# EAGLE board L6470AutoDriver-Panel_v13 (EAGLE 7.5.0), part 1 of 3
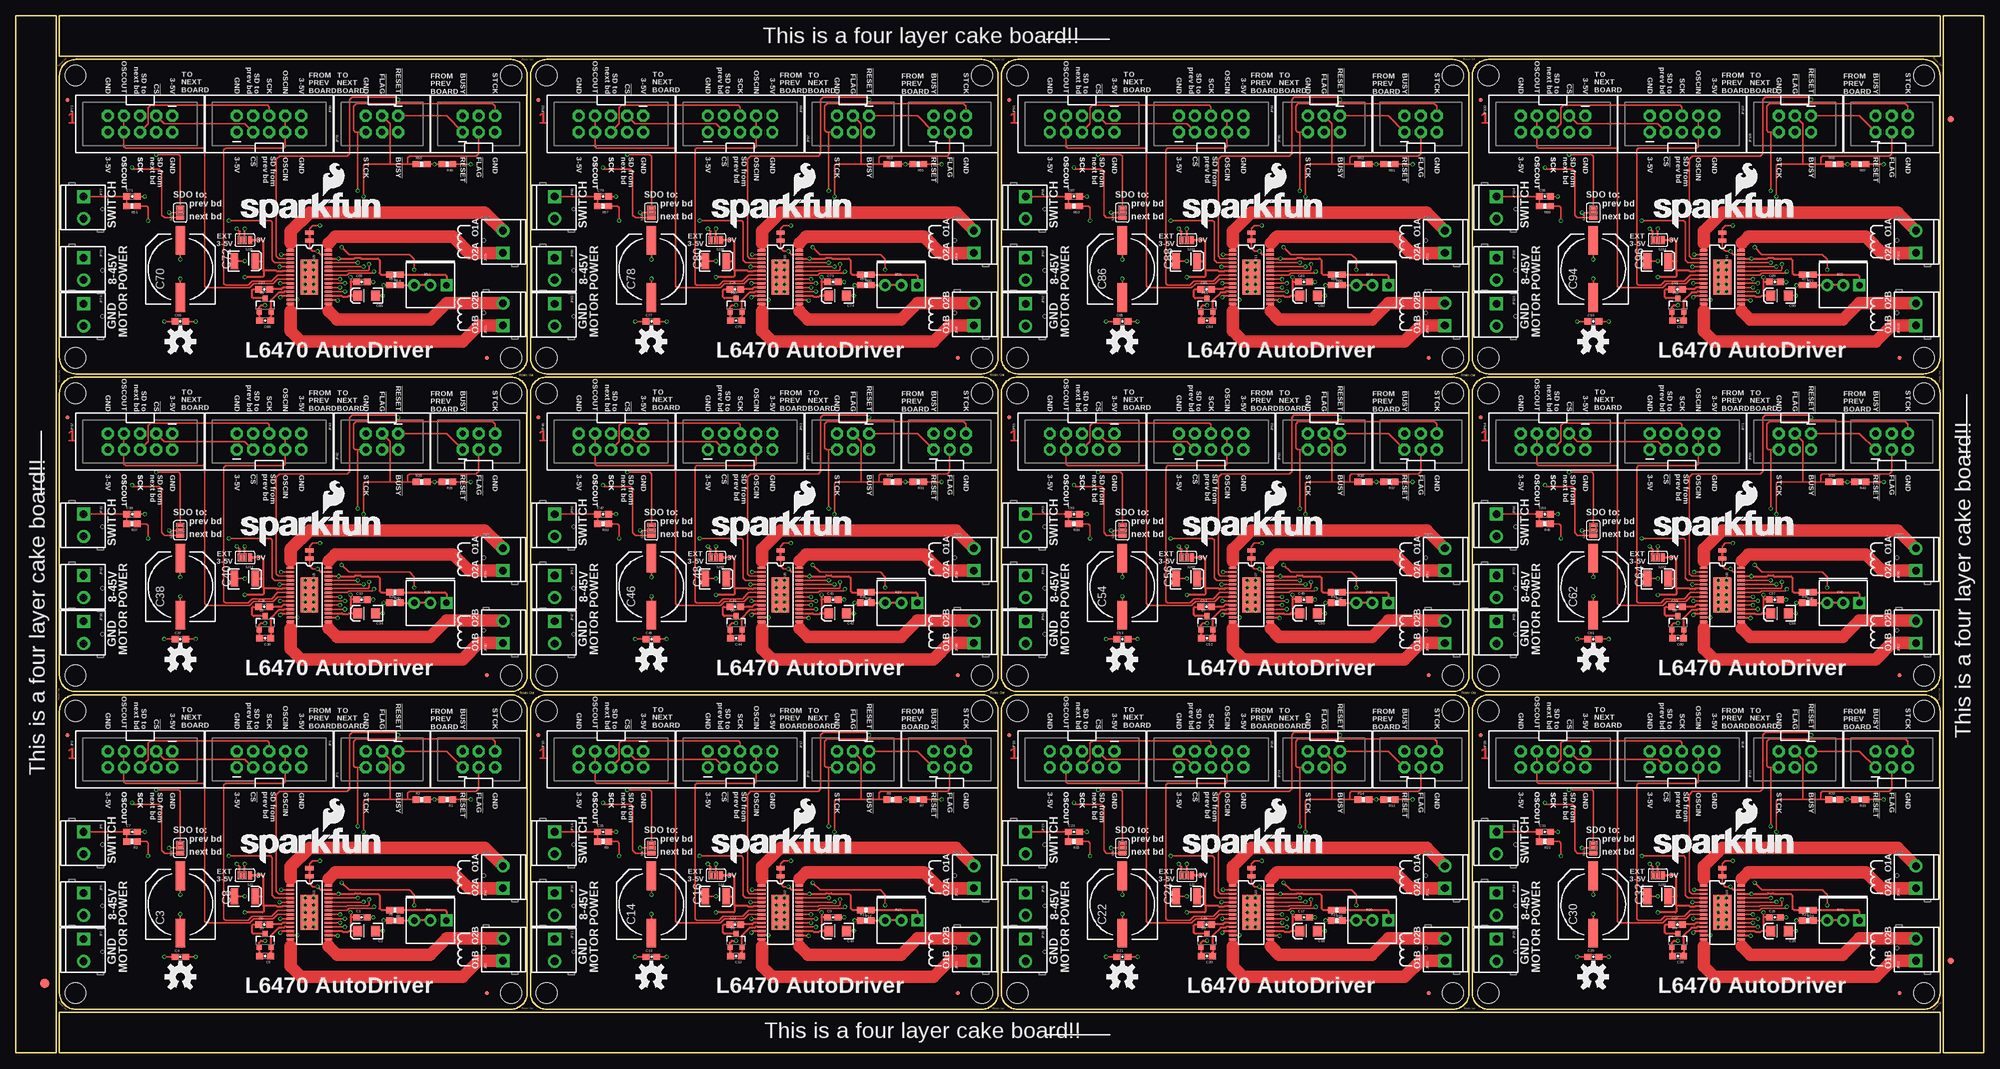
[diagram p0: board, top side]
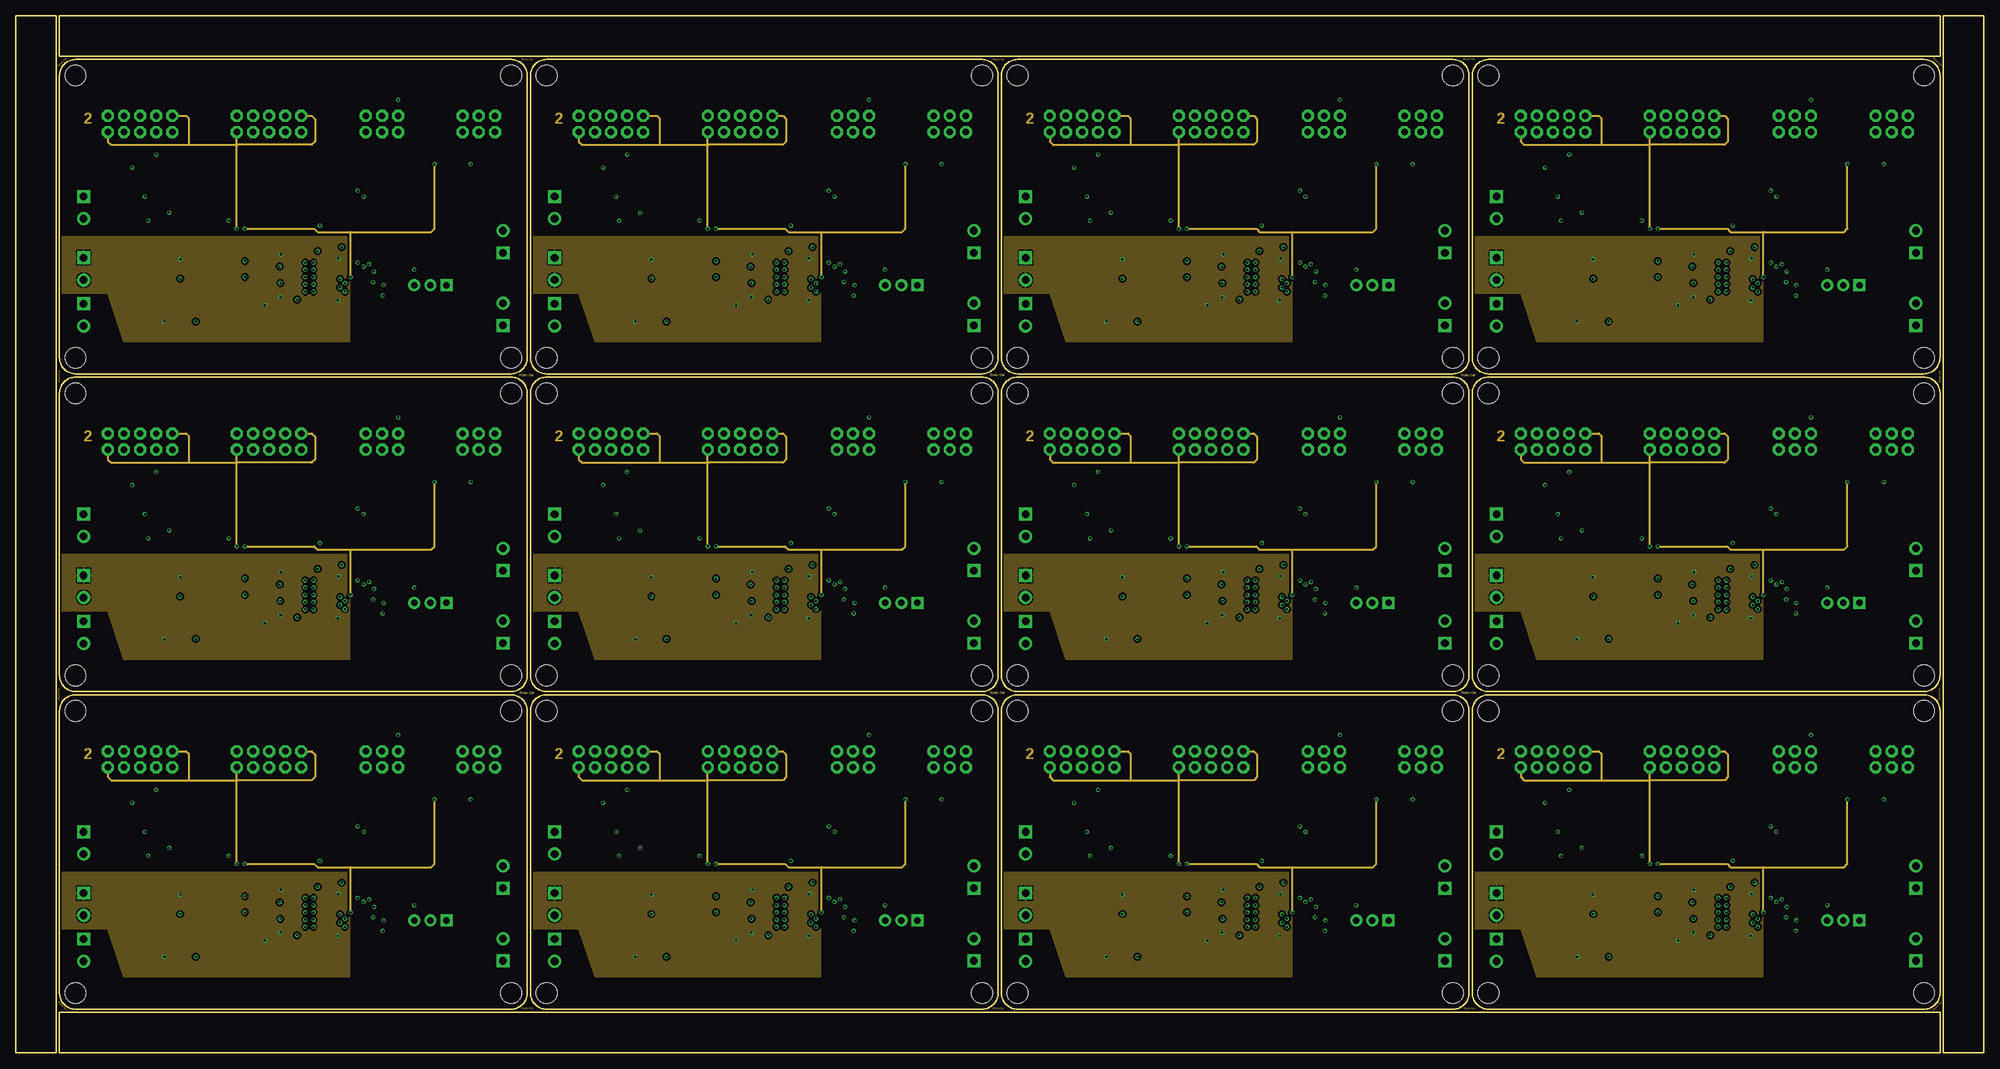
[diagram p1: board, inner layer Route2]
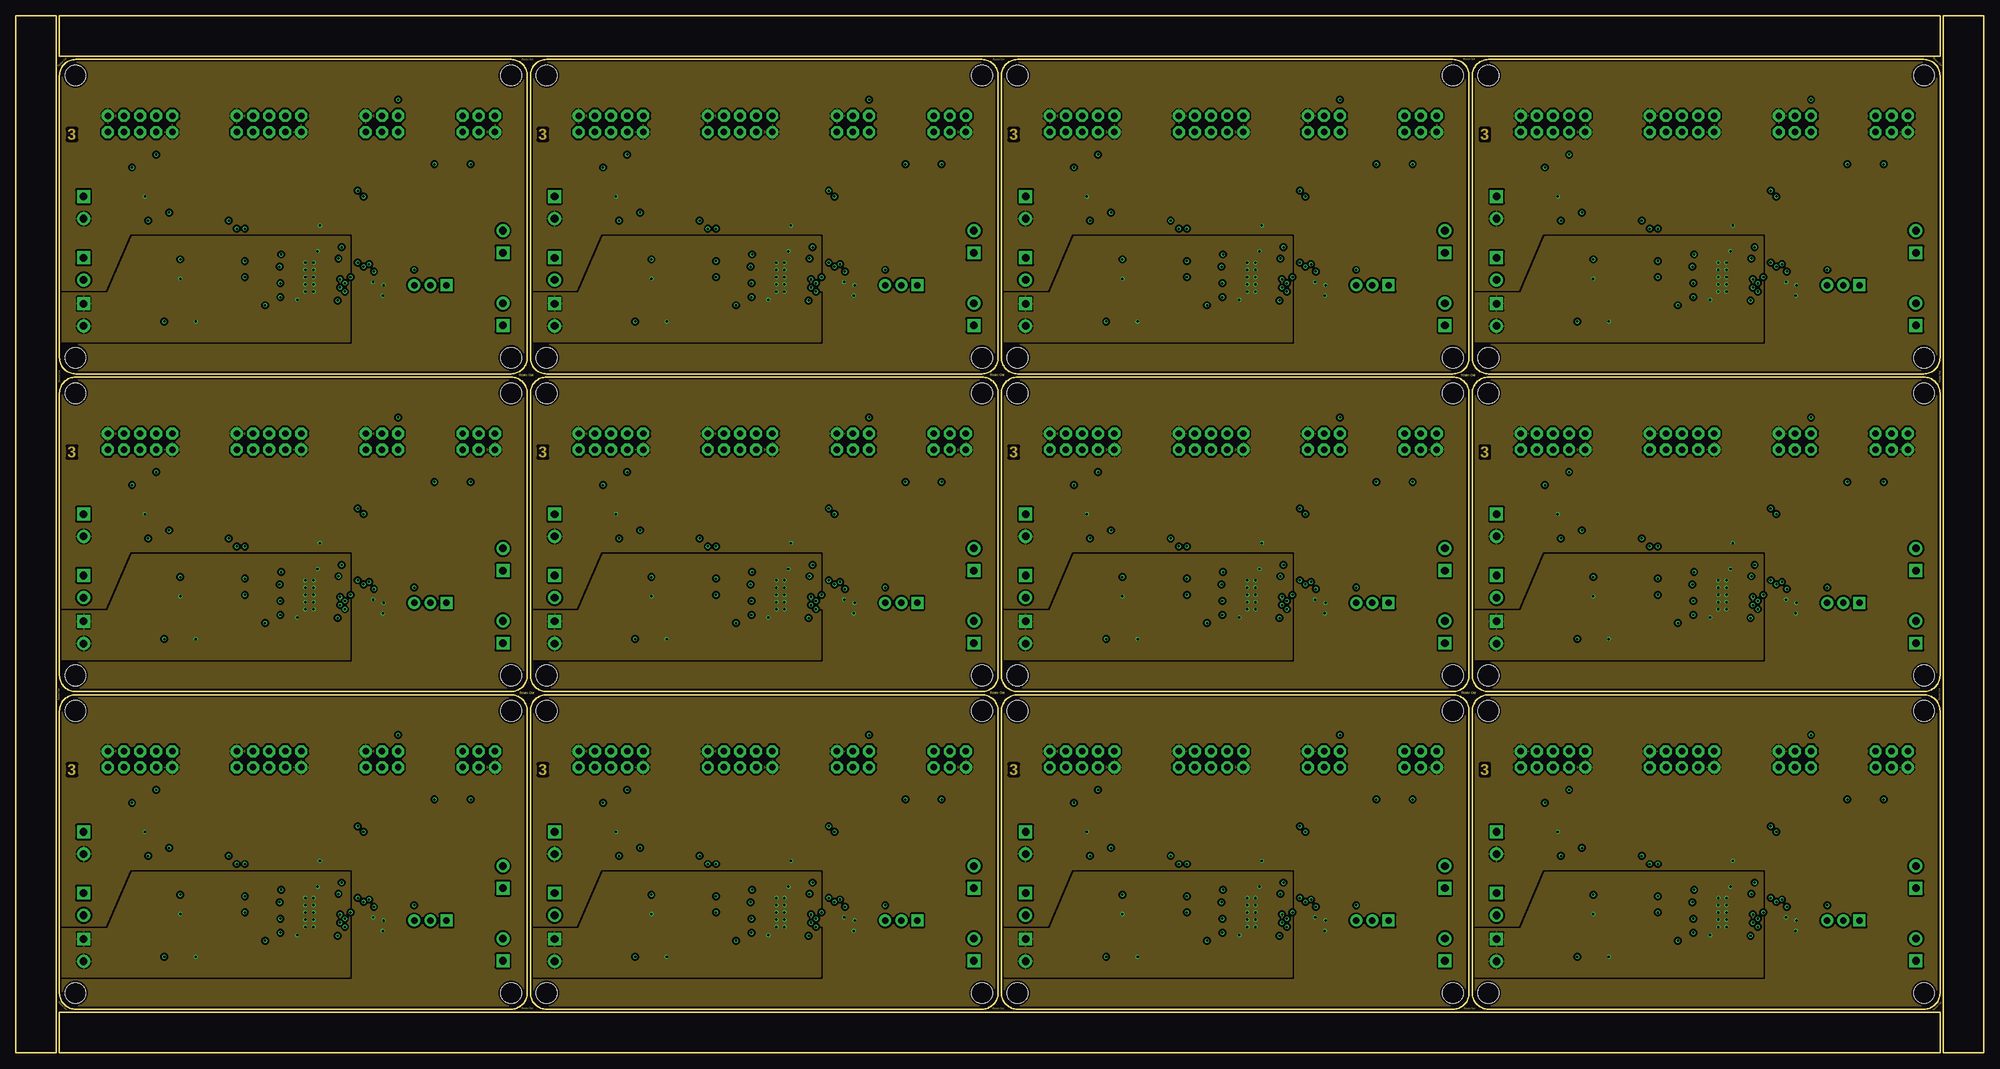
[diagram p2: board, inner layer Route15]
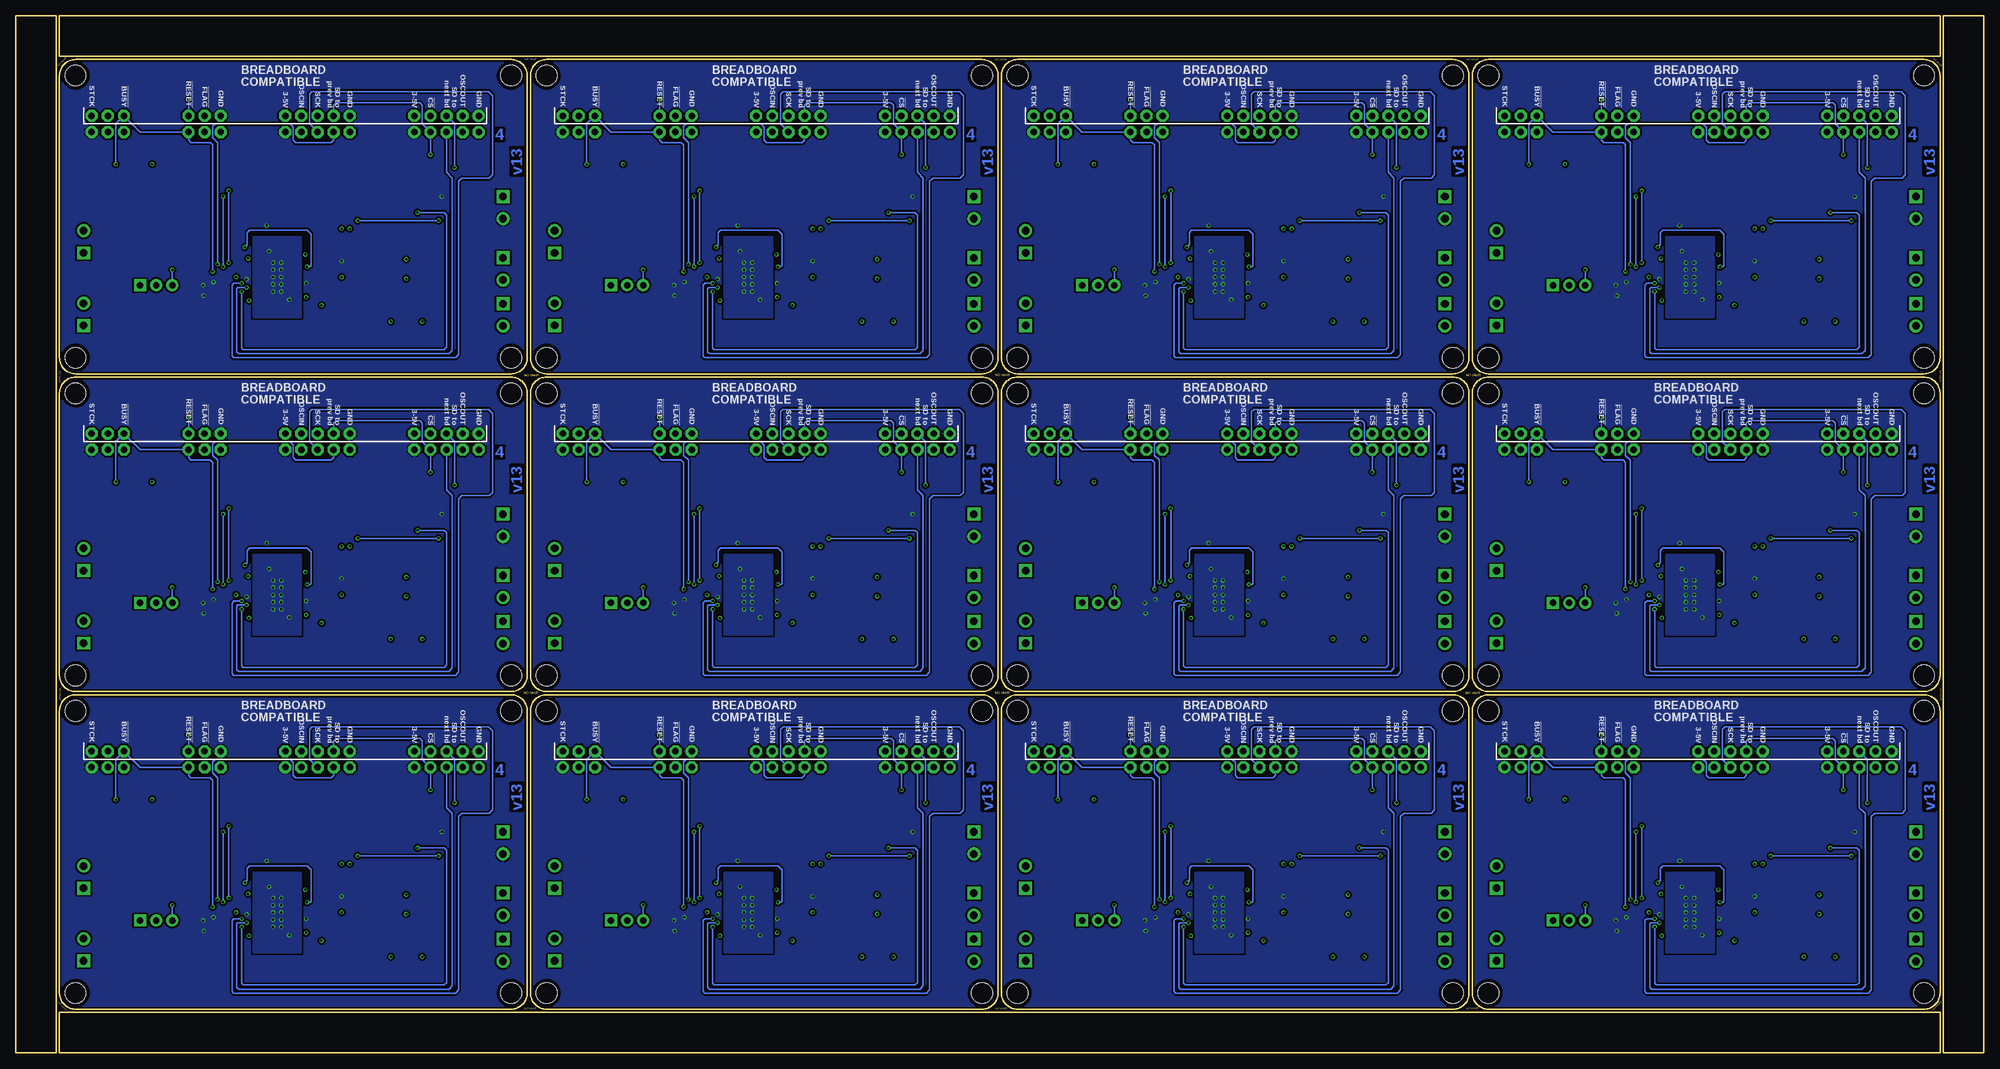
[diagram p3: board, bottom side, seen from below]

Size 309.88 x 163.32 mm. Coordinates in mm from the lower left corner, seen from the top.
Outline: 6.35,79.25 6.35,0 0,0 0,29.72
Outline: 0,27.18 0,163.32 6.35,163.32 6.35,76.71
Outline: 79.25,0 6.86,0 6.86,6.35 29.72,6.35
Outline: 27.18,6.35 303.02,6.35 303.02,0 76.71,0
Outline: 309.88,79.25 309.88,0 303.53,0 303.53,29.72
Outline: 303.53,27.18 303.53,163.32 309.88,163.32 309.88,76.71
Outline: 230.63,163.32 303.02,163.32 303.02,156.97 280.16,156.97
Outline: 282.7,156.97 6.86,156.97 6.86,163.32 233.17,163.32
Outline: 77.98,6.86 9.4,6.86 arc-90 6.86,9.4 6.86,53.85 arc-90 9.4,56.39 77.98,56.39 arc-90 80.52,53.85 80.52,9.4 arc-90 77.98,6.86
Outline: 152.15,6.86 83.57,6.86 arc-90 81.03,9.4 81.03,53.85 arc-90 83.57,56.39 152.15,56.39 arc-90 154.69,53.85 154.69,9.4 arc-90 152.15,6.86
Outline: 226.31,6.86 157.73,6.86 arc-90 155.19,9.4 155.19,53.85 arc-90 157.73,56.39 226.31,56.39 arc-90 228.85,53.85 228.85,9.4 arc-90 226.31,6.86
Outline: 300.48,6.86 231.9,6.86 arc-90 229.36,9.4 229.36,53.85 arc-90 231.9,56.39 300.48,56.39 arc-90 303.02,53.85 303.02,9.4 arc-90 300.48,6.86
Outline: 77.98,56.9 9.4,56.9 arc-90 6.86,59.44 6.86,103.89 arc-90 9.4,106.43 77.98,106.43 arc-90 80.52,103.89 80.52,59.44 arc-90 77.98,56.9
Outline: 152.15,56.9 83.57,56.9 arc-90 81.03,59.44 81.03,103.89 arc-90 83.57,106.43 152.15,106.43 arc-90 154.69,103.89 154.69,59.44 arc-90 152.15,56.9
Outline: 226.31,56.9 157.73,56.9 arc-90 155.19,59.44 155.19,103.89 arc-90 157.73,106.43 226.31,106.43 arc-90 228.85,103.89 228.85,59.44 arc-90 226.31,56.9
Outline: 300.48,56.9 231.9,56.9 arc-90 229.36,59.44 229.36,103.89 arc-90 231.9,106.43 300.48,106.43 arc-90 303.02,103.89 303.02,59.44 arc-90 300.48,56.9
Outline: 77.98,106.93 9.4,106.93 arc-90 6.86,109.47 6.86,153.92 arc-90 9.4,156.46 77.98,156.46 arc-90 80.52,153.92 80.52,109.47 arc-90 77.98,106.93
Outline: 152.15,106.93 83.57,106.93 arc-90 81.03,109.47 81.03,153.92 arc-90 83.57,156.46 152.15,156.46 arc-90 154.69,153.92 154.69,109.47 arc-90 152.15,106.93
Outline: 226.31,106.93 157.73,106.93 arc-90 155.19,109.47 155.19,153.92 arc-90 157.73,156.46 226.31,156.46 arc-90 228.85,153.92 228.85,109.47 arc-90 226.31,106.93
Outline: 300.48,106.93 231.9,106.93 arc-90 229.36,109.47 229.36,153.92 arc-90 231.9,156.46 300.48,156.46 arc-90 303.02,153.92 303.02,109.47 arc-90 300.48,106.93
Copper layers (1*2*15*16): Top 0.035mm / dielectric 0.2mm / Route2 0.035mm / dielectric 0.15mm / Route15 0.035mm / dielectric 0.2mm / Bottom 0.035mm
Design rules "Gold_Phoenix_Standard_Spec_4_layer *": minimum track width 5mil, minimum drill 6mil, track to track 5mil, track to pad 5mil, pad to pad 5mil, via to via 5mil, smd to smd 0mil, copper to edge 8mil, drill to drill 8mil, minimum pad ring 5mil, minimum via ring 5mil, stop-mask expansion 4mil, vias tented up to drill 20mil, thermal gap 10mil

## Footprints (pad centres in the part's own frame; a part is rotated, then mirrored left to right if it is on the bottom)
0603-CAP = smd 1.1 x 1: 1 -0.85,0; 2 0.85,0
EIA3216 = smd 1.4 x 1.6: A 1.4,0; C -1.4,0
NIC_10X10.5_CAP = smd 4.5 x 1.5: + 4.5,0; - -4.5,0
EIA3528 = smd 1.2 x 2.5: A 1.65,0; C -1.65,0
SOT23-3 = smd 0.8 x 0.9: 1 -0.95,-1; 2 0.95,-1; 3 0,1.1
FIDUCIAL-1.5X3 = smd 1.5 x 1.5: 1 0,0
FIDUCIAL-1X2 = smd 1 x 1: 1 0,0
MICRO-FIDUCIAL = smd 0.635 x 0.635: 1 0,0
2X5-SHROUDED = drill 1.016 pad 1.88 octagon: 1 -1.27,5.08; 2 1.27,5.08; 3 -1.27,2.54; 4 1.27,2.54; 5 -1.27,0; 6 1.27,0; 7 -1.27,-2.54; 8 1.27,-2.54; 9 -1.27,-5.08; 10 1.27,-5.08
2X3-SHROUDED = drill 1.016 pad 1.88 octagon: 1 -1.27,2.54; 2 1.27,2.54; 3 -1.27,0; 4 1.27,0; 5 -1.27,-2.54; 6 1.27,-2.54
SCREWTERMINAL-3.5MM-2 = drill 1.2 pad 2.032 square: 1 0,0 | drill 1.2 pad 2.032: 2 3.5,0
0603-RES = smd 1.1 x 1: 1 -0.85,0; 2 0.85,0
3362U = drill 1.016 pad 1.88 square: P$1 0,2.54 | drill 1.016 pad 1.88: P$2 2.54,2.54; P$3 5.08,2.54
PAD-JUMPER-3-2OF3_NC_BY_PASTE_YES_SILK_FULL_BOX = smd 0.635 x 1.27: 1 -0.813,0; 2 0,0; 3 0.813,0
2PT_GND_TIE = smd 1.27 x 0.635: P$1 0,0.635; P$2 0,-0.635
STAND-OFF = hole 3.302: 0,0
TP_15TH = drill 0.381 pad 0.61: P$1 0,0
HTSSOP28 = smd 0.36 x 1.19: 1 -4.225,-2.97; 2 -3.575,-2.97; 3 -2.925,-2.97; 4 -2.275,-2.97; 5 -1.625,-2.97; 6 -0.975,-2.97; 7 -0.325,-2.97; 8 0.325,-2.97; 9 0.975,-2.97; 10 1.625,-2.97; 11 2.275,-2.97; 12 2.925,-2.97; 13 3.575,-2.97; 14 4.225,-2.97; 15 4.225,2.97; 16 3.575,2.97; 17 2.925,2.97; 18 2.275,2.97; 19 1.625,2.97; 20 0.975,2.97; 21 0.325,2.97; 22 -0.325,2.97; 23 -0.975,2.97; 24 -1.625,2.97; 25 -2.275,2.97; 26 -2.925,2.97; 27 -3.575,2.97; 28 -4.225,2.97 | smd 5.5 x 2.8: 29 0,0

## Placement (x,y rotation side)
C1  0.1uF  [0603-CAP]  54.48,21.34 0 top
C2  10uF  [EIA3216]  55.24,19.18 180 top
C3  100uF  [NIC_10X10.5_CAP]  25.91,23.37 90 top
C4  0.22uF  [0603-CAP]  25.91,15.11 0 top
C5  0.22uF  [0603-CAP]  39.24,15.24 180 top
C6  10nF  [0603-CAP]  39.12,20.19 0 top
C7  10nF  [0603-CAP]  18.29,34.8 0 top
C8  47uF  [EIA3528]  36.07,24.64 0 top
C9  0.1uF  [0603-CAP]  128.65,21.34 0 top
C10  10uF  [EIA3216]  129.41,19.18 180 top
C11  10nF  [0603-CAP]  113.28,20.19 0 top
C12  0.22uF  [0603-CAP]  113.41,15.24 180 top
C13  0.22uF  [0603-CAP]  100.08,15.11 0 top
C14  100uF  [NIC_10X10.5_CAP]  100.08,23.37 90 top
C15  10nF  [0603-CAP]  92.46,34.8 0 top
C16  47uF  [EIA3528]  110.24,24.64 0 top
C17  0.1uF  [0603-CAP]  202.82,21.34 0 top
C18  10uF  [EIA3216]  203.58,19.18 180 top
C19  10nF  [0603-CAP]  187.45,20.19 0 top
C20  0.22uF  [0603-CAP]  187.58,15.24 180 top
C21  0.22uF  [0603-CAP]  174.24,15.11 0 top
C22  100uF  [NIC_10X10.5_CAP]  174.24,23.37 90 top
C23  10nF  [0603-CAP]  166.62,34.8 0 top
C24  47uF  [EIA3528]  184.4,24.64 0 top
C25  0.1uF  [0603-CAP]  276.99,21.34 0 top
C26  10uF  [EIA3216]  277.75,19.18 180 top
C27  10nF  [0603-CAP]  261.62,20.19 0 top
C28  0.22uF  [0603-CAP]  261.75,15.24 180 top
C29  0.22uF  [0603-CAP]  248.41,15.11 0 top
C30  100uF  [NIC_10X10.5_CAP]  248.41,23.37 90 top
C31  10nF  [0603-CAP]  240.79,34.8 0 top
C32  47uF  [EIA3528]  258.57,24.64 0 top
C33  0.1uF  [0603-CAP]  54.48,71.37 0 top
C34  10uF  [EIA3216]  55.24,69.22 180 top
C35  10nF  [0603-CAP]  39.12,70.23 0 top
C36  0.22uF  [0603-CAP]  39.24,65.28 180 top
C37  0.22uF  [0603-CAP]  25.91,65.15 0 top
C38  100uF  [NIC_10X10.5_CAP]  25.91,73.41 90 top
C39  10nF  [0603-CAP]  18.29,84.84 0 top
C40  47uF  [EIA3528]  36.07,74.68 0 top
C41  0.1uF  [0603-CAP]  128.65,71.37 0 top
C42  10uF  [EIA3216]  129.41,69.22 180 top
C43  10nF  [0603-CAP]  113.28,70.23 0 top
C44  0.22uF  [0603-CAP]  113.41,65.28 180 top
C45  0.22uF  [0603-CAP]  100.08,65.15 0 top
C46  100uF  [NIC_10X10.5_CAP]  100.08,73.41 90 top
C47  10nF  [0603-CAP]  92.46,84.84 0 top
C48  47uF  [EIA3528]  110.24,74.68 0 top
C49  0.1uF  [0603-CAP]  202.82,71.37 0 top
C50  10uF  [EIA3216]  203.58,69.22 180 top
C51  10nF  [0603-CAP]  187.45,70.23 0 top
C52  0.22uF  [0603-CAP]  187.58,65.28 180 top
C53  0.22uF  [0603-CAP]  174.24,65.15 0 top
C54  100uF  [NIC_10X10.5_CAP]  174.24,73.41 90 top
C55  10nF  [0603-CAP]  166.62,84.84 0 top
C56  47uF  [EIA3528]  184.4,74.68 0 top
C57  0.1uF  [0603-CAP]  276.99,71.37 0 top
C58  10uF  [EIA3216]  277.75,69.22 180 top
C59  10nF  [0603-CAP]  261.62,70.23 0 top
C60  0.22uF  [0603-CAP]  261.75,65.28 180 top
C61  0.22uF  [0603-CAP]  248.41,65.15 0 top
C62  100uF  [NIC_10X10.5_CAP]  248.41,73.41 90 top
C63  10nF  [0603-CAP]  240.79,84.84 0 top
C64  47uF  [EIA3528]  258.57,74.68 0 top
C65  0.1uF  [0603-CAP]  54.48,121.41 0 top
C66  10uF  [EIA3216]  55.24,119.25 180 top
C67  10nF  [0603-CAP]  39.12,120.27 0 top
C68  0.22uF  [0603-CAP]  39.24,115.32 180 top
C69  0.22uF  [0603-CAP]  25.91,115.19 0 top
C70  100uF  [NIC_10X10.5_CAP]  25.91,123.44 90 top
C71  10nF  [0603-CAP]  18.29,134.87 0 top
C72  47uF  [EIA3528]  36.07,124.71 0 top
C73  0.1uF  [0603-CAP]  128.65,121.41 0 top
C74  10uF  [EIA3216]  129.41,119.25 180 top
C75  10nF  [0603-CAP]  113.28,120.27 0 top
C76  0.22uF  [0603-CAP]  113.41,115.32 180 top
C77  0.22uF  [0603-CAP]  100.08,115.19 0 top
C78  100uF  [NIC_10X10.5_CAP]  100.08,123.44 90 top
C79  10nF  [0603-CAP]  92.46,134.87 0 top
C80  47uF  [EIA3528]  110.24,124.71 0 top
C81  0.1uF  [0603-CAP]  202.82,121.41 0 top
C82  10uF  [EIA3216]  203.58,119.25 180 top
C83  10nF  [0603-CAP]  187.45,120.27 0 top
C84  0.22uF  [0603-CAP]  187.58,115.32 180 top
C85  0.22uF  [0603-CAP]  174.24,115.19 0 top
C86  100uF  [NIC_10X10.5_CAP]  174.24,123.44 90 top
C87  10nF  [0603-CAP]  166.62,134.87 0 top
C88  47uF  [EIA3528]  184.4,124.71 0 top
C89  0.1uF  [0603-CAP]  276.99,121.41 0 top
C90  10uF  [EIA3216]  277.75,119.25 180 top
C91  10nF  [0603-CAP]  261.62,120.27 0 top
C92  0.22uF  [0603-CAP]  261.75,115.32 180 top
C93  0.22uF  [0603-CAP]  248.41,115.19 0 top
C94  100uF  [NIC_10X10.5_CAP]  248.41,123.44 90 top
C95  10nF  [0603-CAP]  240.79,134.87 0 top
C96  47uF  [EIA3528]  258.57,124.71 0 top
D1  BAV99  [SOT23-3]  39.24,17.65 0 top
D2  BAV99  [SOT23-3]  113.41,17.65 0 top
D3  BAV99  [SOT23-3]  187.58,17.65 0 top
D4  BAV99  [SOT23-3]  261.75,17.65 0 top
D5  BAV99  [SOT23-3]  39.24,67.69 0 top
D6  BAV99  [SOT23-3]  113.41,67.69 0 top
D7  BAV99  [SOT23-3]  187.58,67.69 0 top
D8  BAV99  [SOT23-3]  261.75,67.69 0 top
D9  BAV99  [SOT23-3]  39.24,117.73 0 top
D10  BAV99  [SOT23-3]  113.41,117.73 0 top
D11  BAV99  [SOT23-3]  187.58,117.73 0 top
D12  BAV99  [SOT23-3]  261.75,117.73 0 top
E$1  [FIDUCIAL-1.5X3]  4.57,10.92 0 top
E$5  [FIDUCIAL-1X2]  304.67,14.48 0 top
E$6  [FIDUCIAL-1X2]  304.67,147.07 180 top
FID1  FIDUCIALUFIDUCIAL  [MICRO-FIDUCIAL]  74.17,9.4 0 top
FID2  FIDUCIALUFIDUCIAL  [MICRO-FIDUCIAL]  8.13,50.04 0 top
FID3  FIDUCIALUFIDUCIAL  [MICRO-FIDUCIAL]  148.34,9.4 0 top
FID4  FIDUCIALUFIDUCIAL  [MICRO-FIDUCIAL]  82.3,50.04 0 top
FID5  FIDUCIALUFIDUCIAL  [MICRO-FIDUCIAL]  222.5,9.4 0 top
FID6  FIDUCIALUFIDUCIAL  [MICRO-FIDUCIAL]  156.46,50.04 0 top
FID7  FIDUCIALUFIDUCIAL  [MICRO-FIDUCIAL]  296.67,9.4 0 top
FID8  FIDUCIALUFIDUCIAL  [MICRO-FIDUCIAL]  230.63,50.04 0 top
FID9  FIDUCIALUFIDUCIAL  [MICRO-FIDUCIAL]  74.17,59.44 0 top
FID10  FIDUCIALUFIDUCIAL  [MICRO-FIDUCIAL]  8.13,100.08 0 top
FID11  FIDUCIALUFIDUCIAL  [MICRO-FIDUCIAL]  148.34,59.44 0 top
FID12  FIDUCIALUFIDUCIAL  [MICRO-FIDUCIAL]  82.3,100.08 0 top
FID13  FIDUCIALUFIDUCIAL  [MICRO-FIDUCIAL]  222.5,59.44 0 top
FID14  FIDUCIALUFIDUCIAL  [MICRO-FIDUCIAL]  156.46,100.08 0 top
FID15  FIDUCIALUFIDUCIAL  [MICRO-FIDUCIAL]  296.67,59.44 0 top
FID16  FIDUCIALUFIDUCIAL  [MICRO-FIDUCIAL]  230.63,100.08 0 top
FID17  FIDUCIALUFIDUCIAL  [MICRO-FIDUCIAL]  74.17,109.47 0 top
FID18  FIDUCIALUFIDUCIAL  [MICRO-FIDUCIAL]  8.13,150.11 0 top
FID19  FIDUCIALUFIDUCIAL  [MICRO-FIDUCIAL]  148.34,109.47 0 top
FID20  FIDUCIALUFIDUCIAL  [MICRO-FIDUCIAL]  82.3,150.11 0 top
FID21  FIDUCIALUFIDUCIAL  [MICRO-FIDUCIAL]  222.5,109.47 0 top
FID22  FIDUCIALUFIDUCIAL  [MICRO-FIDUCIAL]  156.46,150.11 0 top
FID23  FIDUCIALUFIDUCIAL  [MICRO-FIDUCIAL]  296.67,109.47 0 top
FID24  FIDUCIALUFIDUCIAL  [MICRO-FIDUCIAL]  230.63,150.11 0 top
JP1  M05X2SHD  [2X5-SHROUDED]  39.88,46.23 90 top
JP2  M05X2SHD  [2X5-SHROUDED]  19.56,46.23 270 top
JP3  [2X3-SHROUDED]  57.66,46.23 270 top
JP4  [2X3-SHROUDED]  72.9,46.23 90 top
JP5  [SCREWTERMINAL-3.5MM-2]  10.67,34.8 270 top
JP6  [SCREWTERMINAL-3.5MM-2]  10.67,25.15 270 top
JP7  [SCREWTERMINAL-3.5MM-2]  10.67,17.91 270 top
JP8  [SCREWTERMINAL-3.5MM-2]  76.71,25.91 90 top
JP9  [SCREWTERMINAL-3.5MM-2]  76.71,14.48 90 top
JP10  M05X2SHD  [2X5-SHROUDED]  93.73,46.23 270 top
JP11  [SCREWTERMINAL-3.5MM-2]  84.84,17.91 270 top
JP12  [SCREWTERMINAL-3.5MM-2]  150.88,25.91 90 top
JP13  [SCREWTERMINAL-3.5MM-2]  150.88,14.48 90 top
JP14  [SCREWTERMINAL-3.5MM-2]  84.84,34.8 270 top
JP15  M05X2SHD  [2X5-SHROUDED]  114.05,46.23 90 top
JP16  [SCREWTERMINAL-3.5MM-2]  84.84,25.15 270 top
JP17  [2X3-SHROUDED]  131.83,46.23 270 top
JP18  [2X3-SHROUDED]  147.07,46.23 90 top
JP19  M05X2SHD  [2X5-SHROUDED]  167.89,46.23 270 top
JP20  [SCREWTERMINAL-3.5MM-2]  159,17.91 270 top
JP21  [SCREWTERMINAL-3.5MM-2]  225.04,25.91 90 top
JP22  [SCREWTERMINAL-3.5MM-2]  225.04,14.48 90 top
JP23  [SCREWTERMINAL-3.5MM-2]  159,34.8 270 top
JP24  M05X2SHD  [2X5-SHROUDED]  188.21,46.23 90 top
JP25  [SCREWTERMINAL-3.5MM-2]  159,25.15 270 top
JP26  [2X3-SHROUDED]  205.99,46.23 270 top
JP27  [2X3-SHROUDED]  221.23,46.23 90 top
JP28  M05X2SHD  [2X5-SHROUDED]  242.06,46.23 270 top
JP29  [SCREWTERMINAL-3.5MM-2]  233.17,17.91 270 top
JP30  [SCREWTERMINAL-3.5MM-2]  299.21,25.91 90 top
JP31  [SCREWTERMINAL-3.5MM-2]  299.21,14.48 90 top
JP32  [SCREWTERMINAL-3.5MM-2]  233.17,34.8 270 top
JP33  M05X2SHD  [2X5-SHROUDED]  262.38,46.23 90 top
JP34  [SCREWTERMINAL-3.5MM-2]  233.17,25.15 270 top
JP35  [2X3-SHROUDED]  280.16,46.23 270 top
JP36  [2X3-SHROUDED]  295.4,46.23 90 top
JP37  M05X2SHD  [2X5-SHROUDED]  19.56,96.27 270 top
JP38  [SCREWTERMINAL-3.5MM-2]  10.67,67.94 270 top
JP39  [SCREWTERMINAL-3.5MM-2]  76.71,75.95 90 top
JP40  [SCREWTERMINAL-3.5MM-2]  76.71,64.52 90 top
JP41  [SCREWTERMINAL-3.5MM-2]  10.67,84.84 270 top
JP42  M05X2SHD  [2X5-SHROUDED]  39.88,96.27 90 top
JP43  [SCREWTERMINAL-3.5MM-2]  10.67,75.18 270 top
JP44  [2X3-SHROUDED]  57.66,96.27 270 top
JP45  [2X3-SHROUDED]  72.9,96.27 90 top
JP46  M05X2SHD  [2X5-SHROUDED]  93.73,96.27 270 top
JP47  [SCREWTERMINAL-3.5MM-2]  84.84,67.94 270 top
JP48  [SCREWTERMINAL-3.5MM-2]  150.88,75.95 90 top
JP49  [SCREWTERMINAL-3.5MM-2]  150.88,64.52 90 top
JP50  [SCREWTERMINAL-3.5MM-2]  84.84,84.84 270 top
JP51  M05X2SHD  [2X5-SHROUDED]  114.05,96.27 90 top
JP52  [SCREWTERMINAL-3.5MM-2]  84.84,75.18 270 top
JP53  [2X3-SHROUDED]  131.83,96.27 270 top
JP54  [2X3-SHROUDED]  147.07,96.27 90 top
JP55  M05X2SHD  [2X5-SHROUDED]  167.89,96.27 270 top
JP56  [SCREWTERMINAL-3.5MM-2]  159,67.94 270 top
JP57  [SCREWTERMINAL-3.5MM-2]  225.04,75.95 90 top
JP58  [SCREWTERMINAL-3.5MM-2]  225.04,64.52 90 top
JP59  [SCREWTERMINAL-3.5MM-2]  159,84.84 270 top
JP60  M05X2SHD  [2X5-SHROUDED]  188.21,96.27 90 top
JP61  [SCREWTERMINAL-3.5MM-2]  159,75.18 270 top
JP62  [2X3-SHROUDED]  205.99,96.27 270 top
JP63  [2X3-SHROUDED]  221.23,96.27 90 top
JP64  M05X2SHD  [2X5-SHROUDED]  242.06,96.27 270 top
JP65  [SCREWTERMINAL-3.5MM-2]  233.17,67.94 270 top
JP66  [SCREWTERMINAL-3.5MM-2]  299.21,75.95 90 top
JP67  [SCREWTERMINAL-3.5MM-2]  299.21,64.52 90 top
JP68  [SCREWTERMINAL-3.5MM-2]  233.17,84.84 270 top
JP69  M05X2SHD  [2X5-SHROUDED]  262.38,96.27 90 top
JP70  [SCREWTERMINAL-3.5MM-2]  233.17,75.18 270 top
JP71  [2X3-SHROUDED]  280.16,96.27 270 top
JP72  [2X3-SHROUDED]  295.4,96.27 90 top
JP73  M05X2SHD  [2X5-SHROUDED]  19.56,146.3 270 top
JP74  [SCREWTERMINAL-3.5MM-2]  10.67,117.98 270 top
JP75  [SCREWTERMINAL-3.5MM-2]  76.71,125.98 90 top
JP76  [SCREWTERMINAL-3.5MM-2]  76.71,114.55 90 top
JP77  [SCREWTERMINAL-3.5MM-2]  10.67,134.87 270 top
JP78  M05X2SHD  [2X5-SHROUDED]  39.88,146.3 90 top
JP79  [SCREWTERMINAL-3.5MM-2]  10.67,125.22 270 top
JP80  [2X3-SHROUDED]  57.66,146.3 270 top
JP81  [2X3-SHROUDED]  72.9,146.3 90 top
JP82  M05X2SHD  [2X5-SHROUDED]  93.73,146.3 270 top
JP83  [SCREWTERMINAL-3.5MM-2]  84.84,117.98 270 top
JP84  [SCREWTERMINAL-3.5MM-2]  150.88,125.98 90 top
JP85  [SCREWTERMINAL-3.5MM-2]  150.88,114.55 90 top
JP86  [SCREWTERMINAL-3.5MM-2]  84.84,134.87 270 top
JP87  M05X2SHD  [2X5-SHROUDED]  114.05,146.3 90 top
JP88  [SCREWTERMINAL-3.5MM-2]  84.84,125.22 270 top
JP89  [2X3-SHROUDED]  131.83,146.3 270 top
JP90  [2X3-SHROUDED]  147.07,146.3 90 top
JP91  M05X2SHD  [2X5-SHROUDED]  167.89,146.3 270 top
JP92  [SCREWTERMINAL-3.5MM-2]  159,117.98 270 top
JP93  [SCREWTERMINAL-3.5MM-2]  225.04,125.98 90 top
JP94  [SCREWTERMINAL-3.5MM-2]  225.04,114.55 90 top
JP95  [SCREWTERMINAL-3.5MM-2]  159,134.87 270 top
JP96  M05X2SHD  [2X5-SHROUDED]  188.21,146.3 90 top
JP97  [SCREWTERMINAL-3.5MM-2]  159,125.22 270 top
JP98  [2X3-SHROUDED]  205.99,146.3 270 top
JP99  [2X3-SHROUDED]  221.23,146.3 90 top
JP100  M05X2SHD  [2X5-SHROUDED]  242.06,146.3 270 top
JP101  [SCREWTERMINAL-3.5MM-2]  233.17,117.98 270 top
JP102  [SCREWTERMINAL-3.5MM-2]  299.21,125.98 90 top
JP103  [SCREWTERMINAL-3.5MM-2]  299.21,114.55 90 top
JP104  [SCREWTERMINAL-3.5MM-2]  233.17,134.87 270 top
JP105  M05X2SHD  [2X5-SHROUDED]  262.38,146.3 90 top
JP106  [SCREWTERMINAL-3.5MM-2]  233.17,125.22 270 top
JP107  [2X3-SHROUDED]  280.16,146.3 270 top
JP108  [2X3-SHROUDED]  295.4,146.3 90 top
LOGO1  OSHW-LOGOM  [OSHW-LOGO-M]  25.91,11.94 0 top
LOGO2  SFE_LOGO_NAME_FLAME.2_INCH  [SFE_LOGO_NAME_FLAME_.2]  34.8,29.72 0 top
LOGO3  OSHW-LOGOM  [OSHW-LOGO-M]  100.08,11.94 0 top
LOGO4  SFE_LOGO_NAME_FLAME.2_INCH  [SFE_LOGO_NAME_FLAME_.2]  108.97,29.72 0 top
LOGO5  OSHW-LOGOM  [OSHW-LOGO-M]  174.24,11.94 0 top
LOGO6  SFE_LOGO_NAME_FLAME.2_INCH  [SFE_LOGO_NAME_FLAME_.2]  183.13,29.72 0 top
LOGO7  OSHW-LOGOM  [OSHW-LOGO-M]  248.41,11.94 0 top
LOGO8  SFE_LOGO_NAME_FLAME.2_INCH  [SFE_LOGO_NAME_FLAME_.2]  257.3,29.72 0 top
LOGO9  OSHW-LOGOM  [OSHW-LOGO-M]  25.91,61.98 0 top
LOGO10  SFE_LOGO_NAME_FLAME.2_INCH  [SFE_LOGO_NAME_FLAME_.2]  34.8,79.76 0 top
LOGO11  OSHW-LOGOM  [OSHW-LOGO-M]  100.08,61.98 0 top
LOGO12  SFE_LOGO_NAME_FLAME.2_INCH  [SFE_LOGO_NAME_FLAME_.2]  108.97,79.76 0 top
LOGO13  OSHW-LOGOM  [OSHW-LOGO-M]  174.24,61.98 0 top
LOGO14  SFE_LOGO_NAME_FLAME.2_INCH  [SFE_LOGO_NAME_FLAME_.2]  183.13,79.76 0 top
LOGO15  OSHW-LOGOM  [OSHW-LOGO-M]  248.41,61.98 0 top
LOGO16  SFE_LOGO_NAME_FLAME.2_INCH  [SFE_LOGO_NAME_FLAME_.2]  257.3,79.76 0 top
LOGO17  OSHW-LOGOM  [OSHW-LOGO-M]  25.91,112.01 0 top
LOGO18  SFE_LOGO_NAME_FLAME.2_INCH  [SFE_LOGO_NAME_FLAME_.2]  34.8,129.79 0 top
LOGO19  OSHW-LOGOM  [OSHW-LOGO-M]  100.08,112.01 0 top
LOGO20  SFE_LOGO_NAME_FLAME.2_INCH  [SFE_LOGO_NAME_FLAME_.2]  108.97,129.79 0 top
LOGO21  OSHW-LOGOM  [OSHW-LOGO-M]  174.24,112.01 0 top
LOGO22  SFE_LOGO_NAME_FLAME.2_INCH  [SFE_LOGO_NAME_FLAME_.2]  183.13,129.79 0 top
LOGO23  OSHW-LOGOM  [OSHW-LOGO-M]  248.41,112.01 0 top
LOGO24  SFE_LOGO_NAME_FLAME.2_INCH  [SFE_LOGO_NAME_FLAME_.2]  257.3,129.79 0 top
R1  10k  [0603-RES]  67.94,39.88 180 top
R2  10k  [0603-RES]  63.88,39.88 0 top
R3  100  [0603-RES]  18.29,33.27 180 top
R4  200k  [3362U]  67.82,23.37 180 top
R5  8.2k  [0603-RES]  59.69,20.83 0 top
R6  33k  [0603-RES]  59.69,22.48 180 top
R7  10k  [0603-RES]  142.11,39.88 180 top
R8  10k  [0603-RES]  138.05,39.88 0 top
R9  100  [0603-RES]  92.46,33.27 180 top
R10  200k  [3362U]  141.99,23.37 180 top
R11  8.2k  [0603-RES]  133.86,20.83 0 top
R12  33k  [0603-RES]  133.86,22.48 180 top
R13  10k  [0603-RES]  216.28,39.88 180 top
R14  10k  [0603-RES]  212.22,39.88 0 top
R15  100  [0603-RES]  166.62,33.27 180 top
R16  200k  [3362U]  216.15,23.37 180 top
R17  8.2k  [0603-RES]  208.03,20.83 0 top
R18  33k  [0603-RES]  208.03,22.48 180 top
R19  10k  [0603-RES]  290.45,39.88 180 top
R20  10k  [0603-RES]  286.38,39.88 0 top
R21  100  [0603-RES]  240.79,33.27 180 top
R22  200k  [3362U]  290.32,23.37 180 top
R23  8.2k  [0603-RES]  282.19,20.83 0 top
R24  33k  [0603-RES]  282.19,22.48 180 top
R25  10k  [0603-RES]  67.94,89.92 180 top
R26  10k  [0603-RES]  63.88,89.92 0 top
R27  100  [0603-RES]  18.29,83.31 180 top
R28  200k  [3362U]  67.82,73.41 180 top
R29  8.2k  [0603-RES]  59.69,70.87 0 top
R30  33k  [0603-RES]  59.69,72.52 180 top
R31  10k  [0603-RES]  142.11,89.92 180 top
R32  10k  [0603-RES]  138.05,89.92 0 top
R33  100  [0603-RES]  92.46,83.31 180 top
R34  200k  [3362U]  141.99,73.41 180 top
R35  8.2k  [0603-RES]  133.86,70.87 0 top
R36  33k  [0603-RES]  133.86,72.52 180 top
R37  10k  [0603-RES]  216.28,89.92 180 top
R38  10k  [0603-RES]  212.22,89.92 0 top
R39  100  [0603-RES]  166.62,83.31 180 top
R40  200k  [3362U]  216.15,73.41 180 top
R41  8.2k  [0603-RES]  208.03,70.87 0 top
R42  33k  [0603-RES]  208.03,72.52 180 top
R43  10k  [0603-RES]  290.45,89.92 180 top
R44  10k  [0603-RES]  286.38,89.92 0 top
R45  100  [0603-RES]  240.79,83.31 180 top
R46  200k  [3362U]  290.32,73.41 180 top
R47  8.2k  [0603-RES]  282.19,70.87 0 top
R48  33k  [0603-RES]  282.19,72.52 180 top
R49  10k  [0603-RES]  67.94,139.95 180 top
R50  10k  [0603-RES]  63.88,139.95 0 top
R51  100  [0603-RES]  18.29,133.35 180 top
R52  200k  [3362U]  67.82,123.44 180 top
R53  8.2k  [0603-RES]  59.69,120.9 0 top
R54  33k  [0603-RES]  59.69,122.56 180 top
R55  10k  [0603-RES]  142.11,139.95 180 top
R56  10k  [0603-RES]  138.05,139.95 0 top
R57  100  [0603-RES]  92.46,133.35 180 top
R58  200k  [3362U]  141.99,123.44 180 top
R59  8.2k  [0603-RES]  133.86,120.9 0 top
R60  33k  [0603-RES]  133.86,122.56 180 top
R61  10k  [0603-RES]  216.28,139.95 180 top
R62  10k  [0603-RES]  212.22,139.95 0 top
R63  100  [0603-RES]  166.62,133.35 180 top
R64  200k  [3362U]  216.15,123.44 180 top
R65  8.2k  [0603-RES]  208.03,120.9 0 top
R66  33k  [0603-RES]  208.03,122.56 180 top
R67  10k  [0603-RES]  290.45,139.95 180 top
R68  10k  [0603-RES]  286.38,139.95 0 top
R69  100  [0603-RES]  240.79,133.35 180 top
R70  200k  [3362U]  290.32,123.44 180 top
R71  8.2k  [0603-RES]  282.19,120.9 0 top
R72  33k  [0603-RES]  282.19,122.56 180 top
SJ1  JUMPER-PAD-3-2OF3_NC_BY_PASTE  [PAD-JUMPER-3-2OF3_NC_BY_PASTE_YES_SILK_FULL_BOX]  36.07,27.94 180 top
SJ2  2PT_GND_TIE  [2PT_GND_TIE]  46.23,28.45 0 top
SJ3  JUMPER-PAD-3-2OF3_NC_BY_PASTE  [PAD-JUMPER-3-2OF3_NC_BY_PASTE_YES_SILK_FULL_BOX]  25.91,32.26 90 top
SJ4  JUMPER-PAD-3-2OF3_NC_BY_PASTE  [PAD-JUMPER-3-2OF3_NC_BY_PASTE_YES_SILK_FULL_BOX]  110.24,27.94 180 top
SJ5  2PT_GND_TIE  [2PT_GND_TIE]  120.4,28.45 0 top
SJ6  JUMPER-PAD-3-2OF3_NC_BY_PASTE  [PAD-JUMPER-3-2OF3_NC_BY_PASTE_YES_SILK_FULL_BOX]  100.08,32.26 90 top
SJ7  JUMPER-PAD-3-2OF3_NC_BY_PASTE  [PAD-JUMPER-3-2OF3_NC_BY_PASTE_YES_SILK_FULL_BOX]  184.4,27.94 180 top
SJ8  2PT_GND_TIE  [2PT_GND_TIE]  194.56,28.45 0 top
SJ9  JUMPER-PAD-3-2OF3_NC_BY_PASTE  [PAD-JUMPER-3-2OF3_NC_BY_PASTE_YES_SILK_FULL_BOX]  174.24,32.26 90 top
SJ10  JUMPER-PAD-3-2OF3_NC_BY_PASTE  [PAD-JUMPER-3-2OF3_NC_BY_PASTE_YES_SILK_FULL_BOX]  258.57,27.94 180 top
SJ11  2PT_GND_TIE  [2PT_GND_TIE]  268.73,28.45 0 top
SJ12  JUMPER-PAD-3-2OF3_NC_BY_PASTE  [PAD-JUMPER-3-2OF3_NC_BY_PASTE_YES_SILK_FULL_BOX]  248.41,32.26 90 top
SJ13  JUMPER-PAD-3-2OF3_NC_BY_PASTE  [PAD-JUMPER-3-2OF3_NC_BY_PASTE_YES_SILK_FULL_BOX]  36.07,77.98 180 top
SJ14  2PT_GND_TIE  [2PT_GND_TIE]  46.23,78.49 0 top
SJ15  JUMPER-PAD-3-2OF3_NC_BY_PASTE  [PAD-JUMPER-3-2OF3_NC_BY_PASTE_YES_SILK_FULL_BOX]  25.91,82.3 90 top
SJ16  JUMPER-PAD-3-2OF3_NC_BY_PASTE  [PAD-JUMPER-3-2OF3_NC_BY_PASTE_YES_SILK_FULL_BOX]  110.24,77.98 180 top
SJ17  2PT_GND_TIE  [2PT_GND_TIE]  120.4,78.49 0 top
SJ18  JUMPER-PAD-3-2OF3_NC_BY_PASTE  [PAD-JUMPER-3-2OF3_NC_BY_PASTE_YES_SILK_FULL_BOX]  100.08,82.3 90 top
SJ19  JUMPER-PAD-3-2OF3_NC_BY_PASTE  [PAD-JUMPER-3-2OF3_NC_BY_PASTE_YES_SILK_FULL_BOX]  184.4,77.98 180 top
SJ20  2PT_GND_TIE  [2PT_GND_TIE]  194.56,78.49 0 top
SJ21  JUMPER-PAD-3-2OF3_NC_BY_PASTE  [PAD-JUMPER-3-2OF3_NC_BY_PASTE_YES_SILK_FULL_BOX]  174.24,82.3 90 top
SJ22  JUMPER-PAD-3-2OF3_NC_BY_PASTE  [PAD-JUMPER-3-2OF3_NC_BY_PASTE_YES_SILK_FULL_BOX]  258.57,77.98 180 top
SJ23  2PT_GND_TIE  [2PT_GND_TIE]  268.73,78.49 0 top
SJ24  JUMPER-PAD-3-2OF3_NC_BY_PASTE  [PAD-JUMPER-3-2OF3_NC_BY_PASTE_YES_SILK_FULL_BOX]  248.41,82.3 90 top
SJ25  JUMPER-PAD-3-2OF3_NC_BY_PASTE  [PAD-JUMPER-3-2OF3_NC_BY_PASTE_YES_SILK_FULL_BOX]  36.07,128.02 180 top
SJ26  2PT_GND_TIE  [2PT_GND_TIE]  46.23,128.52 0 top
SJ27  JUMPER-PAD-3-2OF3_NC_BY_PASTE  [PAD-JUMPER-3-2OF3_NC_BY_PASTE_YES_SILK_FULL_BOX]  25.91,132.33 90 top
SJ28  JUMPER-PAD-3-2OF3_NC_BY_PASTE  [PAD-JUMPER-3-2OF3_NC_BY_PASTE_YES_SILK_FULL_BOX]  110.24,128.02 180 top
SJ29  2PT_GND_TIE  [2PT_GND_TIE]  120.4,128.52 0 top
SJ30  JUMPER-PAD-3-2OF3_NC_BY_PASTE  [PAD-JUMPER-3-2OF3_NC_BY_PASTE_YES_SILK_FULL_BOX]  100.08,132.33 90 top
SJ31  JUMPER-PAD-3-2OF3_NC_BY_PASTE  [PAD-JUMPER-3-2OF3_NC_BY_PASTE_YES_SILK_FULL_BOX]  184.4,128.02 180 top
SJ32  2PT_GND_TIE  [2PT_GND_TIE]  194.56,128.52 0 top
SJ33  JUMPER-PAD-3-2OF3_NC_BY_PASTE  [PAD-JUMPER-3-2OF3_NC_BY_PASTE_YES_SILK_FULL_BOX]  174.24,132.33 90 top
SJ34  JUMPER-PAD-3-2OF3_NC_BY_PASTE  [PAD-JUMPER-3-2OF3_NC_BY_PASTE_YES_SILK_FULL_BOX]  258.57,128.02 180 top
SJ35  2PT_GND_TIE  [2PT_GND_TIE]  268.73,128.52 0 top
SJ36  JUMPER-PAD-3-2OF3_NC_BY_PASTE  [PAD-JUMPER-3-2OF3_NC_BY_PASTE_YES_SILK_FULL_BOX]  248.41,132.33 90 top
STANDOFF1  STAND-OFF  [STAND-OFF]  77.98,53.85 0 top
STANDOFF2  STAND-OFF  [STAND-OFF]  77.98,9.4 0 top
STANDOFF3  STAND-OFF  [STAND-OFF]  9.4,9.4 0 top
STANDOFF4  STAND-OFF  [STAND-OFF]  9.4,53.85 0 top
STANDOFF5  STAND-OFF  [STAND-OFF]  152.15,9.4 0 top
STANDOFF6  STAND-OFF  [STAND-OFF]  83.57,53.85 0 top
STANDOFF7  STAND-OFF  [STAND-OFF]  152.15,53.85 0 top
STANDOFF8  STAND-OFF  [STAND-OFF]  83.57,9.4 0 top
STANDOFF9  STAND-OFF  [STAND-OFF]  226.31,9.4 0 top
STANDOFF10  STAND-OFF  [STAND-OFF]  157.73,53.85 0 top
STANDOFF11  STAND-OFF  [STAND-OFF]  226.31,53.85 0 top
STANDOFF12  STAND-OFF  [STAND-OFF]  157.73,9.4 0 top
STANDOFF13  STAND-OFF  [STAND-OFF]  300.48,9.4 0 top
STANDOFF14  STAND-OFF  [STAND-OFF]  231.9,53.85 0 top
STANDOFF15  STAND-OFF  [STAND-OFF]  300.48,53.85 0 top
STANDOFF16  STAND-OFF  [STAND-OFF]  231.9,9.4 0 top
STANDOFF17  STAND-OFF  [STAND-OFF]  77.98,59.44 0 top
STANDOFF18  STAND-OFF  [STAND-OFF]  9.4,103.89 0 top
STANDOFF19  STAND-OFF  [STAND-OFF]  77.98,103.89 0 top
STANDOFF20  STAND-OFF  [STAND-OFF]  9.4,59.44 0 top
STANDOFF21  STAND-OFF  [STAND-OFF]  152.15,59.44 0 top
STANDOFF22  STAND-OFF  [STAND-OFF]  83.57,103.89 0 top
STANDOFF23  STAND-OFF  [STAND-OFF]  152.15,103.89 0 top
STANDOFF24  STAND-OFF  [STAND-OFF]  83.57,59.44 0 top
STANDOFF25  STAND-OFF  [STAND-OFF]  226.31,59.44 0 top
STANDOFF26  STAND-OFF  [STAND-OFF]  157.73,103.89 0 top
STANDOFF27  STAND-OFF  [STAND-OFF]  226.31,103.89 0 top
STANDOFF28  STAND-OFF  [STAND-OFF]  157.73,59.44 0 top
STANDOFF29  STAND-OFF  [STAND-OFF]  300.48,59.44 0 top
STANDOFF30  STAND-OFF  [STAND-OFF]  231.9,103.89 0 top
STANDOFF31  STAND-OFF  [STAND-OFF]  300.48,103.89 0 top
STANDOFF32  STAND-OFF  [STAND-OFF]  231.9,59.44 0 top
STANDOFF33  STAND-OFF  [STAND-OFF]  77.98,109.47 0 top
STANDOFF34  STAND-OFF  [STAND-OFF]  9.4,153.92 0 top
STANDOFF35  STAND-OFF  [STAND-OFF]  77.98,153.92 0 top
STANDOFF36  STAND-OFF  [STAND-OFF]  9.4,109.47 0 top
STANDOFF37  STAND-OFF  [STAND-OFF]  152.15,109.47 0 top
STANDOFF38  STAND-OFF  [STAND-OFF]  83.57,153.92 0 top
STANDOFF39  STAND-OFF  [STAND-OFF]  152.15,153.92 0 top
STANDOFF40  STAND-OFF  [STAND-OFF]  83.57,109.47 0 top
STANDOFF41  STAND-OFF  [STAND-OFF]  226.31,109.47 0 top
STANDOFF42  STAND-OFF  [STAND-OFF]  157.73,153.92 0 top
STANDOFF43  STAND-OFF  [STAND-OFF]  226.31,153.92 0 top
STANDOFF44  STAND-OFF  [STAND-OFF]  157.73,109.47 0 top
STANDOFF45  STAND-OFF  [STAND-OFF]  300.48,109.47 0 top
STANDOFF46  STAND-OFF  [STAND-OFF]  231.9,153.92 0 top
STANDOFF47  STAND-OFF  [STAND-OFF]  300.48,153.92 0 top
STANDOFF48  STAND-OFF  [STAND-OFF]  231.9,109.47 0 top
TP1  TEST-POINTTP_15TH_THRU  [TP_15TH]  36.07,22.1 0 top
TP2  TEST-POINTTP_15TH_THRU  [TP_15TH]  110.24,22.1 0 top
TP3  TEST-POINTTP_15TH_THRU  [TP_15TH]  184.4,22.1 0 top
TP4  TEST-POINTTP_15TH_THRU  [TP_15TH]  258.57,22.1 0 top
TP5  TEST-POINTTP_15TH_THRU  [TP_15TH]  36.07,72.14 0 top
TP6  TEST-POINTTP_15TH_THRU  [TP_15TH]  110.24,72.14 0 top
TP7  TEST-POINTTP_15TH_THRU  [TP_15TH]  184.4,72.14 0 top
TP8  TEST-POINTTP_15TH_THRU  [TP_15TH]  258.57,72.14 0 top
TP9  TEST-POINTTP_15TH_THRU  [TP_15TH]  36.07,122.17 0 top
TP10  TEST-POINTTP_15TH_THRU  [TP_15TH]  110.24,122.17 0 top
TP11  TEST-POINTTP_15TH_THRU  [TP_15TH]  184.4,122.17 0 top
TP12  TEST-POINTTP_15TH_THRU  [TP_15TH]  258.57,122.17 0 top
U1  L6470  [HTSSOP28]  46.23,22.1 270 top
U2  L6470  [HTSSOP28]  120.4,22.1 270 top
U3  L6470  [HTSSOP28]  194.56,22.1 270 top
U4  L6470  [HTSSOP28]  268.73,22.1 270 top
U5  L6470  [HTSSOP28]  46.23,72.14 270 top
U6  L6470  [HTSSOP28]  120.4,72.14 270 top
U7  L6470  [HTSSOP28]  194.56,72.14 270 top
U8  L6470  [HTSSOP28]  268.73,72.14 270 top
U9  L6470  [HTSSOP28]  46.23,122.17 270 top
U10  L6470  [HTSSOP28]  120.4,122.17 270 top
U11  L6470  [HTSSOP28]  194.56,122.17 270 top
U12  L6470  [HTSSOP28]  268.73,122.17 270 top

## Library data of the parts
C1 C9 C17 C25 C33 C41 C49 C57 C65 C73 C81 C89 = SparkFun-Capacitors; PROD_ID: CAP-00810
C2 C10 C18 C26 C34 C42 C50 C58 C66 C74 C82 C90 = SparkFun-Capacitors; PROD_ID: CAP-00811
C3 C14 C22 C30 C38 C46 C54 C62 C70 C78 C86 C94 = SparkFun-Capacitors; PROD_ID: CAP-08362
C4 C5 C12 C13 C20 C21 C28 C29 C36 C37 C44 C45 C52 C53 C60 C61 C68 C69 C76 C77 C84 C85 C92 C93 = SparkFun-Capacitors; PROD_ID: CAP-09885
C6 C7 C11 C15 C19 C23 C27 C31 C35 C39 C43 C47 C51 C55 C59 C63 C67 C71 C75 C79 C83 C87 C91 C95 = SparkFun-Capacitors; PROD_ID: CAP-00867
C8 C16 C24 C32 C40 C48 C56 C64 C72 C80 C88 C96 = SparkFun-Capacitors; PROD_ID: CAP-08310
D1-D12 = SparkFun-DiscreteSemi; PROD_ID: DIO-10647
E$1 = SparkFun-Retired
E$5 E$6 FID1-FID24 LOGO1-LOGO24 = SparkFun-Aesthetics
JP1 JP2 JP10 JP15 JP19 JP24 JP28 JP33 JP37 JP42 JP46 JP51 JP55 JP60 JP64 JP69 JP73 JP78 JP82 JP87 JP91 JP96 JP100 JP105 = SparkFun-Connectors
JP3 JP4 JP17 JP18 JP26 JP27 JP35 JP36 JP44 JP45 JP53 JP54 JP62 JP63 JP71 JP72 JP80 JP81 JP89 JP90 JP98 JP99 JP107 JP108 = SparkFun-Connectors; PROD_ID: CONN-10681
JP5-JP9 JP11-JP14 JP16 JP20-JP23 JP25 JP29-JP32 JP34 JP38-JP41 JP43 JP47-JP50 JP52 JP56-JP59 JP61 JP65-JP68 JP70 JP74-JP77 JP79 JP83-JP86 JP88 JP92-JP95 JP97 JP101-JP104 JP106 STANDOFF1-STANDOFF48 = SparkFun
R1 R2 R7 R8 R13 R14 R19 R20 R25 R26 R31 R32 R37 R38 R43 R44 R49 R50 R55 R56 R61 R62 R67 R68 = SparkFun-Resistors; PROD_ID: RES-00824
R3 R9 R15 R21 R27 R33 R39 R45 R51 R57 R63 R69 = SparkFun-Resistors; PROD_ID: RES-07863
R4 R10 R16 R22 R28 R34 R40 R46 R52 R58 R64 R70 = SparkFun-Electromechanical
R5 R11 R17 R23 R29 R35 R41 R47 R53 R59 R65 R71 = SparkFun-Resistors; PROD_ID: RES-10646
R6 R12 R18 R24 R30 R36 R42 R48 R54 R60 R66 R72 = SparkFun-Resistors; PROD_ID: RES-08416
SJ1-SJ36 TP1-TP12 = SparkFun-Passives
U1-U12 = SparkFun-PowerIC; PROD_ID: IC-10648

## Nets
3.3V: C8.A SJ1.1 TP1.P$1 U1.6
3.3V1: C16.A SJ4.1 TP2.P$1 U2.6
3.3V2: C24.A SJ7.1 TP3.P$1 U3.6
3.3V3: C32.A SJ10.1 TP4.P$1 U4.6
3.3V4: C40.A SJ13.1 TP5.P$1 U5.6
3.3V5: C48.A SJ16.1 TP6.P$1 U6.6
3.3V6: C56.A SJ19.1 TP7.P$1 U7.6
3.3V7: C64.A SJ22.1 TP8.P$1 U8.6
3.3V8: C72.A SJ25.1 TP9.P$1 U9.6
3.3V9: C80.A SJ28.1 TP10.P$1 U10.6
3.3V10: C88.A SJ31.1 TP11.P$1 U11.6
3.3V11: C96.A SJ34.1 TP12.P$1 U12.6
5V: JP1.1 JP1.10 JP2.1 JP2.10 SJ1.3
5V1: JP10.1 JP10.10 JP15.1 JP15.10 SJ4.3
5V2: JP19.1 JP19.10 JP24.1 JP24.10 SJ7.3
5V3: JP28.1 JP28.10 JP33.1 JP33.10 SJ10.3
5V4: JP37.1 JP37.10 JP42.1 JP42.10 SJ13.3
5V5: JP46.1 JP46.10 JP51.1 JP51.10 SJ16.3
5V6: JP55.1 JP55.10 JP60.1 JP60.10 SJ19.3
5V7: JP64.1 JP64.10 JP69.1 JP69.10 SJ22.3
5V8: JP73.1 JP73.10 JP78.1 JP78.10 SJ25.3
5V9: JP82.1 JP82.10 JP87.1 JP87.10 SJ28.3
5V10: JP91.1 JP91.10 JP96.1 JP96.10 SJ31.3
5V11: JP100.1 JP100.10 JP105.1 JP105.10 SJ34.3
ADC: R4.P$2 R4.P$3 R5.2 U1.5
ADC1: R10.P$2 R10.P$3 R11.2 U2.5
ADC2: R16.P$2 R16.P$3 R17.2 U3.5
ADC3: R22.P$2 R22.P$3 R23.2 U4.5
ADC4: R28.P$2 R28.P$3 R29.2 U5.5
ADC5: R34.P$2 R34.P$3 R35.2 U6.5
ADC6: R40.P$2 R40.P$3 R41.2 U7.5
ADC7: R46.P$2 R46.P$3 R47.2 U8.5
ADC8: R52.P$2 R52.P$3 R53.2 U9.5
ADC9: R58.P$2 R58.P$3 R59.2 U10.5
ADC10: R64.P$2 R64.P$3 R65.2 U11.5
ADC11: R70.P$2 R70.P$3 R71.2 U12.5
BUSYN: JP3.2 JP4.2 R1.1 U1.22
BUSYN1: JP17.2 JP18.2 R7.1 U2.22
BUSYN2: JP26.2 JP27.2 R13.1 U3.22
BUSYN3: JP35.2 JP36.2 R19.1 U4.22
BUSYN4: JP44.2 JP45.2 R25.1 U5.22
BUSYN5: JP53.2 JP54.2 R31.1 U6.22
BUSYN6: JP62.2 JP63.2 R37.1 U7.22
BUSYN7: JP71.2 JP72.2 R43.1 U8.22
BUSYN8: JP80.2 JP81.2 R49.1 U9.22
BUSYN9: JP89.2 JP90.2 R55.1 U10.22
BUSYN10: JP98.2 JP99.2 R61.1 U11.22
BUSYN11: JP107.2 JP108.2 R67.1 U12.22
CP_HIGH: C6.1 D1.3
CP_HIGH1: C11.1 D2.3
CP_HIGH2: C19.1 D3.3
CP_HIGH3: C27.1 D4.3
CP_HIGH4: C35.1 D5.3
CP_HIGH5: C43.1 D6.3
CP_HIGH6: C51.1 D7.3
CP_HIGH7: C59.1 D8.3
CP_HIGH8: C67.1 D9.3
CP_HIGH9: C75.1 D10.3
CP_HIGH10: C83.1 D11.3
CP_HIGH11: C91.1 D12.3
CSN: JP1.3 JP2.3 U1.23
CSN1: JP10.3 JP15.3 U2.23
CSN2: JP19.3 JP24.3 U3.23
CSN3: JP28.3 JP33.3 U4.23
CSN4: JP37.3 JP42.3 U5.23
CSN5: JP46.3 JP51.3 U6.23
CSN6: JP55.3 JP60.3 U7.23
CSN7: JP64.3 JP69.3 U8.23
CSN8: JP73.3 JP78.3 U9.23
CSN9: JP82.3 JP87.3 U10.23
CSN10: JP91.3 JP96.3 U11.23
CSN11: JP100.3 JP105.3 U12.23
D_RETURN: JP1.4 JP2.4 SJ3.3
D_RETURN1: JP10.4 JP15.4 SJ6.3
D_RETURN2: JP19.4 JP24.4 SJ9.3
D_RETURN3: JP28.4 JP33.4 SJ12.3
D_RETURN4: JP37.4 JP42.4 SJ15.3
D_RETURN5: JP46.4 JP51.4 SJ18.3
D_RETURN6: JP55.4 JP60.4 SJ21.3
D_RETURN7: JP64.4 JP69.4 SJ24.3
D_RETURN8: JP73.4 JP78.4 SJ27.3
D_RETURN9: JP82.4 JP87.4 SJ30.3
D_RETURN10: JP91.4 JP96.4 SJ33.3
D_RETURN11: JP100.4 JP105.4 SJ36.3
FLAGN: JP3.3 JP4.3 R2.1 U1.24
FLAGN1: JP17.3 JP18.3 R8.1 U2.24
FLAGN2: JP26.3 JP27.3 R14.1 U3.24
FLAGN3: JP35.3 JP36.3 R20.1 U4.24
FLAGN4: JP44.3 JP45.3 R26.1 U5.24
FLAGN5: JP53.3 JP54.3 R32.1 U6.24
FLAGN6: JP62.3 JP63.3 R38.1 U7.24
FLAGN7: JP71.3 JP72.3 R44.1 U8.24
FLAGN8: JP80.3 JP81.3 R50.1 U9.24
FLAGN9: JP89.3 JP90.3 R56.1 U10.24
FLAGN10: JP98.3 JP99.3 R62.1 U11.24
FLAGN11: JP107.3 JP108.3 R68.1 U12.24
GND: C1.2 C2.C C7.2 C8.C JP1.2 JP1.9 JP2.2 JP2.9 JP3.5 JP4.5 JP5.2 R5.1 SJ2.P$1 U1.9 U1.21
GND1: C9.2 C10.C C15.2 C16.C JP10.2 JP10.9 JP14.2 JP15.2 JP15.9 JP17.5 JP18.5 R11.1 SJ5.P$1 U2.9 U2.21
GND2: C17.2 C18.C C23.2 C24.C JP19.2 JP19.9 JP23.2 JP24.2 JP24.9 JP26.5 JP27.5 R17.1 SJ8.P$1 U3.9 U3.21
GND3: C25.2 C26.C C31.2 C32.C JP28.2 JP28.9 JP32.2 JP33.2 JP33.9 JP35.5 JP36.5 R23.1 SJ11.P$1 U4.9 U4.21
GND4: C33.2 C34.C C39.2 C40.C JP37.2 JP37.9 JP41.2 JP42.2 JP42.9 JP44.5 JP45.5 R29.1 SJ14.P$1 U5.9 U5.21
GND5: C41.2 C42.C C47.2 C48.C JP46.2 JP46.9 JP50.2 JP51.2 JP51.9 JP53.5 JP54.5 R35.1 SJ17.P$1 U6.9 U6.21
GND6: C49.2 C50.C C55.2 C56.C JP55.2 JP55.9 JP59.2 JP60.2 JP60.9 JP62.5 JP63.5 R41.1 SJ20.P$1 U7.9 U7.21
GND7: C57.2 C58.C C63.2 C64.C JP64.2 JP64.9 JP68.2 JP69.2 JP69.9 JP71.5 JP72.5 R47.1 SJ23.P$1 U8.9 U8.21
GND8: C65.2 C66.C C71.2 C72.C JP73.2 JP73.9 JP77.2 JP78.2 JP78.9 JP80.5 JP81.5 R53.1 SJ26.P$1 U9.9 U9.21
GND9: C73.2 C74.C C79.2 C80.C JP82.2 JP82.9 JP86.2 JP87.2 JP87.9 JP89.5 JP90.5 R59.1 SJ29.P$1 U10.9 U10.21
GND10: C81.2 C82.C C87.2 C88.C JP91.2 JP91.9 JP95.2 JP96.2 JP96.9 JP98.5 JP99.5 R65.1 SJ32.P$1 U11.9 U11.21
GND11: C89.2 C90.C C95.2 C96.C JP100.2 JP100.9 JP104.2 JP105.2 JP105.9 JP107.5 JP108.5 R71.1 SJ35.P$1 U12.9 U12.21
N$1: R10.P$1 R12.1
N$2: R16.P$1 R18.1
N$3: R22.P$1 R24.1
N$4: R28.P$1 R30.1
N$5: R34.P$1 R36.1
N$6: R40.P$1 R42.1
N$7: R46.P$1 R48.1
N$8: R52.P$1 R54.1
N$9: R58.P$1 R60.1
N$10: R64.P$1 R66.1
N$11: R4.P$1 R6.1
N$12: R70.P$1 R72.1
OSCIN: JP1.7 JP1.8 U1.7
OSCIN1: JP15.7 JP15.8 U2.7
OSCIN2: JP24.7 JP24.8 U3.7
OSCIN3: JP33.7 JP33.8 U4.7
OSCIN4: JP42.7 JP42.8 U5.7
OSCIN5: JP51.7 JP51.8 U6.7
OSCIN6: JP60.7 JP60.8 U7.7
OSCIN7: JP69.7 JP69.8 U8.7
OSCIN8: JP78.7 JP78.8 U9.7
OSCIN9: JP87.7 JP87.8 U10.7
OSCIN10: JP96.7 JP96.8 U11.7
OSCIN11: JP105.7 JP105.8 U12.7
OSCOUT: JP2.7 JP2.8 U1.8
OSCOUT1: JP10.7 JP10.8 U2.8
OSCOUT2: JP19.7 JP19.8 U3.8
OSCOUT3: JP28.7 JP28.8 U4.8
OSCOUT4: JP37.7 JP37.8 U5.8
OSCOUT5: JP46.7 JP46.8 U6.8
OSCOUT6: JP55.7 JP55.8 U7.8
OSCOUT7: JP64.7 JP64.8 U8.8
OSCOUT8: JP73.7 JP73.8 U9.8
OSCOUT9: JP82.7 JP82.8 U10.8
OSCOUT10: JP91.7 JP91.8 U11.8
OSCOUT11: JP100.7 JP100.8 U12.8
OUT1A: JP8.2 U1.1
OUT1A1: JP12.2 U2.1
OUT1A2: JP21.2 U3.1
OUT1A3: JP30.2 U4.1
OUT1A4: JP39.2 U5.1
OUT1A5: JP48.2 U6.1
OUT1A6: JP57.2 U7.1
OUT1A7: JP66.2 U8.1
OUT1A8: JP75.2 U9.1
OUT1A9: JP84.2 U10.1
OUT1A10: JP93.2 U11.1
OUT1A11: JP102.2 U12.1
OUT1B: JP9.1 U1.14
OUT1B1: JP13.1 U2.14
OUT1B2: JP22.1 U3.14
OUT1B3: JP31.1 U4.14
OUT1B4: JP40.1 U5.14
OUT1B5: JP49.1 U6.14
OUT1B6: JP58.1 U7.14
OUT1B7: JP67.1 U8.14
OUT1B8: JP76.1 U9.14
OUT1B9: JP85.1 U10.14
OUT1B10: JP94.1 U11.14
OUT1B11: JP103.1 U12.14
OUT2A: JP8.1 U1.28
OUT2A1: JP12.1 U2.28
OUT2A2: JP21.1 U3.28
OUT2A3: JP30.1 U4.28
OUT2A4: JP39.1 U5.28
OUT2A5: JP48.1 U6.28
OUT2A6: JP57.1 U7.28
OUT2A7: JP66.1 U8.28
OUT2A8: JP75.1 U9.28
OUT2A9: JP84.1 U10.28
OUT2A10: JP93.1 U11.28
OUT2A11: JP102.1 U12.28
OUT2B: JP9.2 U1.15
OUT2B1: JP13.2 U2.15
OUT2B2: JP22.2 U3.15
OUT2B3: JP31.2 U4.15
OUT2B4: JP40.2 U5.15
OUT2B5: JP49.2 U6.15
OUT2B6: JP58.2 U7.15
OUT2B7: JP67.2 U8.15
OUT2B8: JP76.2 U9.15
OUT2B9: JP85.2 U10.15
OUT2B10: JP94.2 U11.15
OUT2B11: JP103.2 U12.15
PGND: C3.- C4.2 JP7.1 JP7.2 SJ2.P$2 U1.13 U1.27 U1.29
PGND1: C13.2 C14.- JP11.1 JP11.2 SJ5.P$2 U2.13 U2.27 U2.29
PGND2: C21.2 C22.- JP20.1 JP20.2 SJ8.P$2 U3.13 U3.27 U3.29
PGND3: C29.2 C30.- JP29.1 JP29.2 SJ11.P$2 U4.13 U4.27 U4.29
PGND4: C37.2 C38.- JP38.1 JP38.2 SJ14.P$2 U5.13 U5.27 U5.29
PGND5: C45.2 C46.- JP47.1 JP47.2 SJ17.P$2 U6.13 U6.27 U6.29
PGND6: C53.2 C54.- JP56.1 JP56.2 SJ20.P$2 U7.13 U7.27 U7.29
PGND7: C61.2 C62.- JP65.1 JP65.2 SJ23.P$2 U8.13 U8.27 U8.29
PGND8: C69.2 C70.- JP74.1 JP74.2 SJ26.P$2 U9.13 U9.27 U9.29
PGND9: C77.2 C78.- JP83.1 JP83.2 SJ29.P$2 U10.13 U10.27 U10.29
PGND10: C85.2 C86.- JP92.1 JP92.2 SJ32.P$2 U11.13 U11.27 U11.29
PGND11: C93.2 C94.- JP101.1 JP101.2 SJ35.P$2 U12.13 U12.27 U12.29
RESETN: JP3.1 JP4.1 U1.3
RESETN1: JP17.1 JP18.1 U2.3
RESETN2: JP26.1 JP27.1 U3.3
RESETN3: JP35.1 JP36.1 U4.3
RESETN4: JP44.1 JP45.1 U5.3
RESETN5: JP53.1 JP54.1 U6.3
RESETN6: JP62.1 JP63.1 U7.3
RESETN7: JP71.1 JP72.1 U8.3
RESETN8: JP80.1 JP81.1 U9.3
RESETN9: JP89.1 JP90.1 U10.3
RESETN10: JP98.1 JP99.1 U11.3
RESETN11: JP107.1 JP108.1 U12.3
SCK: JP1.6 JP2.6 U1.19
SCK1: JP10.6 JP15.6 U2.19
SCK2: JP19.6 JP24.6 U3.19
SCK3: JP28.6 JP33.6 U4.19
SCK4: JP37.6 JP42.6 U5.19
SCK5: JP46.6 JP51.6 U6.19
SCK6: JP55.6 JP60.6 U7.19
SCK7: JP64.6 JP69.6 U8.19
SCK8: JP73.6 JP78.6 U9.19
SCK9: JP82.6 JP87.6 U10.19
SCK10: JP91.6 JP96.6 U11.19
SCK11: JP100.6 JP105.6 U12.19
SDI: JP1.5 U1.20
SDI1: JP15.5 U2.20
SDI2: JP24.5 U3.20
SDI3: JP33.5 U4.20
SDI4: JP42.5 U5.20
SDI5: JP51.5 U6.20
SDI6: JP60.5 U7.20
SDI7: JP69.5 U8.20
SDI8: JP78.5 U9.20
SDI9: JP87.5 U10.20
SDI10: JP96.5 U11.20
SDI11: JP105.5 U12.20
SDO: SJ3.2 U1.18
SDO1: SJ6.2 U2.18
SDO2: SJ9.2 U3.18
SDO3: SJ12.2 U4.18
SDO4: SJ15.2 U5.18
SDO5: SJ18.2 U6.18
SDO6: SJ21.2 U7.18
SDO7: SJ24.2 U8.18
SDO8: SJ27.2 U9.18
SDO9: SJ30.2 U10.18
SDO10: SJ33.2 U11.18
SDO11: SJ36.2 U12.18
SDO_DOWNSTREAM: JP2.5 SJ3.1
SDO_DOWNSTREAM1: JP10.5 SJ6.1
SDO_DOWNSTREAM2: JP19.5 SJ9.1
SDO_DOWNSTREAM3: JP28.5 SJ12.1
SDO_DOWNSTREAM4: JP37.5 SJ15.1
SDO_DOWNSTREAM5: JP46.5 SJ18.1
SDO_DOWNSTREAM6: JP55.5 SJ21.1
SDO_DOWNSTREAM7: JP64.5 SJ24.1
SDO_DOWNSTREAM8: JP73.5 SJ27.1
SDO_DOWNSTREAM9: JP82.5 SJ30.1
SDO_DOWNSTREAM10: JP91.5 SJ33.1
SDO_DOWNSTREAM11: JP100.5 SJ36.1
STCK: JP3.6 JP4.6 U1.25
STCK1: JP17.6 JP18.6 U2.25
STCK2: JP26.6 JP27.6 U3.25
STCK3: JP35.6 JP36.6 U4.25
STCK4: JP44.6 JP45.6 U5.25
STCK5: JP53.6 JP54.6 U6.25
STCK6: JP62.6 JP63.6 U7.25
STCK7: JP71.6 JP72.6 U8.25
STCK8: JP80.6 JP81.6 U9.25
STCK9: JP89.6 JP90.6 U10.25
STCK10: JP98.6 JP99.6 U11.25
STCK11: JP107.6 JP108.6 U12.25
SWITCH_INPUT: C7.1 JP5.1 R3.2
SWITCH_INPUT1: C15.1 JP14.1 R9.2
SWITCH_INPUT2: C23.1 JP23.1 R15.2
SWITCH_INPUT3: C31.1 JP32.1 R21.2
SWITCH_INPUT4: C39.1 JP41.1 R27.2
SWITCH_INPUT5: C47.1 JP50.1 R33.2
SWITCH_INPUT6: C55.1 JP59.1 R39.2
SWITCH_INPUT7: C63.1 JP68.1 R45.2
SWITCH_INPUT8: C71.1 JP77.1 R51.2
SWITCH_INPUT9: C79.1 JP86.1 R57.2
SWITCH_INPUT10: C87.1 JP95.1 R63.2
SWITCH_INPUT11: C95.1 JP104.1 R69.2
SWITCH_SIG: R3.1 U1.4
SWITCH_SIG1: R9.1 U2.4
SWITCH_SIG2: R15.1 U3.4
SWITCH_SIG3: R21.1 U4.4
SWITCH_SIG4: R27.1 U5.4
SWITCH_SIG5: R33.1 U6.4
SWITCH_SIG6: R39.1 U7.4
SWITCH_SIG7: R45.1 U8.4
SWITCH_SIG8: R51.1 U9.4
SWITCH_SIG9: R57.1 U10.4
SWITCH_SIG10: R63.1 U11.4
SWITCH_SIG11: R69.1 U12.4
V_BOOT: C5.1 D1.2 U1.11
V_BOOT1: C12.1 D2.2 U2.11
V_BOOT2: C20.1 D3.2 U3.11
V_BOOT3: C28.1 D4.2 U4.11
V_BOOT4: C36.1 D5.2 U5.11
V_BOOT5: C44.1 D6.2 U6.11
V_BOOT6: C52.1 D7.2 U7.11
V_BOOT7: C60.1 D8.2 U8.11
V_BOOT8: C68.1 D9.2 U9.11
V_BOOT9: C76.1 D10.2 U10.11
V_BOOT10: C84.1 D11.2 U11.11
V_BOOT11: C92.1 D12.2 U12.11
V_CP: C6.2 U1.10
V_CP1: C11.2 U2.10
V_CP2: C19.2 U3.10
V_CP3: C27.2 U4.10
V_CP4: C35.2 U5.10
V_CP5: C43.2 U6.10
V_CP6: C51.2 U7.10
V_CP7: C59.2 U8.10
V_CP8: C67.2 U9.10
V_CP9: C75.2 U10.10
V_CP10: C83.2 U11.10
V_CP11: C91.2 U12.10
VLOGIC: C1.1 C2.A R1.2 R2.2 SJ1.2 U1.17
VLOGIC1: C9.1 C10.A R7.2 R8.2 SJ4.2 U2.17
VLOGIC2: C17.1 C18.A R13.2 R14.2 SJ7.2 U3.17
VLOGIC3: C25.1 C26.A R19.2 R20.2 SJ10.2 U4.17
VLOGIC4: C33.1 C34.A R25.2 R26.2 SJ13.2 U5.17
VLOGIC5: C41.1 C42.A R31.2 R32.2 SJ16.2 U6.17
VLOGIC6: C49.1 C50.A R37.2 R38.2 SJ19.2 U7.17
VLOGIC7: C57.1 C58.A R43.2 R44.2 SJ22.2 U8.17
VLOGIC8: C65.1 C66.A R49.2 R50.2 SJ25.2 U9.17
VLOGIC9: C73.1 C74.A R55.2 R56.2 SJ28.2 U10.17
VLOGIC10: C81.1 C82.A R61.2 R62.2 SJ31.2 U11.17
VLOGIC11: C89.1 C90.A R67.2 R68.2 SJ34.2 U12.17
VS: C3.+ C4.1 C5.2 D1.1 JP6.1 JP6.2 R6.2 U1.2 U1.12 U1.16 U1.26
VS1: C12.2 C13.1 C14.+ D2.1 JP16.1 JP16.2 R12.2 U2.2 U2.12 U2.16 U2.26
VS2: C20.2 C21.1 C22.+ D3.1 JP25.1 JP25.2 R18.2 U3.2 U3.12 U3.16 U3.26
VS3: C28.2 C29.1 C30.+ D4.1 JP34.1 JP34.2 R24.2 U4.2 U4.12 U4.16 U4.26
VS4: C36.2 C37.1 C38.+ D5.1 JP43.1 JP43.2 R30.2 U5.2 U5.12 U5.16 U5.26
VS5: C44.2 C45.1 C46.+ D6.1 JP52.1 JP52.2 R36.2 U6.2 U6.12 U6.16 U6.26
VS6: C52.2 C53.1 C54.+ D7.1 JP61.1 JP61.2 R42.2 U7.2 U7.12 U7.16 U7.26
VS7: C60.2 C61.1 C62.+ D8.1 JP70.1 JP70.2 R48.2 U8.2 U8.12 U8.16 U8.26
VS8: C68.2 C69.1 C70.+ D9.1 JP79.1 JP79.2 R54.2 U9.2 U9.12 U9.16 U9.26
VS9: C76.2 C77.1 C78.+ D10.1 JP88.1 JP88.2 R60.2 U10.2 U10.12 U10.16 U10.26
VS10: C84.2 C85.1 C86.+ D11.1 JP97.1 JP97.2 R66.2 U11.2 U11.12 U11.16 U11.26
VS11: C92.2 C93.1 C94.+ D12.1 JP106.1 JP106.2 R72.2 U12.2 U12.12 U12.16 U12.26

## Tracks (layer width: path | path; a pad name or v marks a point on that pad's centre or on a via)
3.3V
  Top 0.203: 39.03,23.07 38.99,23.11
  Top 0.305: U1.6 42,23.07 41.91,22.99 41.15,22.99 41.02,23.11 38.99,23.11 | 38.99,23.11 38.99,22.23 38.86,22.1 TP1.P$1 | 37.59,27.94 SJ1.1 38.73,27.94 38.99,27.69 38.99,24.64 | C8.A 38.99,24.64 | 38.99,23.11 38.99,24.64
3.3V1
  Top 0.203: 113.2,23.07 113.16,23.11
  Top 0.305: U2.6 116.16,23.07 116.08,22.99 115.32,22.99 115.19,23.11 113.16,23.11 | 113.16,23.11 113.16,22.23 113.03,22.1 TP2.P$1 | 111.76,27.94 SJ4.1 112.9,27.94 113.16,27.69 113.16,24.64 | C16.A 113.16,24.64 | 113.16,23.11 113.16,24.64
3.3V2
  Top 0.203: 187.37,23.07 187.32,23.11
  Top 0.305: U3.6 190.33,23.07 190.25,22.99 189.48,22.99 189.36,23.11 187.32,23.11 | 187.32,23.11 187.32,22.23 187.2,22.1 TP3.P$1 | 185.93,27.94 SJ7.1 187.07,27.94 187.32,27.69 187.32,24.64 | C24.A 187.32,24.64 | 187.32,23.11 187.32,24.64
3.3V3
  Top 0.203: 261.53,23.07 261.49,23.11
  Top 0.305: U4.6 264.5,23.07 264.41,22.99 263.65,22.99 263.52,23.11 261.49,23.11 | 261.49,23.11 261.49,22.23 261.37,22.1 TP4.P$1 | 260.1,27.94 SJ10.1 261.24,27.94 261.49,27.69 261.49,24.64 | C32.A 261.49,24.64 | 261.49,23.11 261.49,24.64
3.3V4
  Top 0.203: 39.03,73.11 38.99,73.15
  Top 0.305: U5.6 42,73.11 41.91,73.03 41.15,73.03 41.02,73.15 38.99,73.15 | 38.99,73.15 38.99,72.26 38.86,72.14 TP5.P$1 | 37.59,77.98 SJ13.1 38.73,77.98 38.99,77.72 38.99,74.68 | C40.A 38.99,74.68 | 38.99,73.15 38.99,74.68
3.3V5
  Top 0.203: 113.2,73.11 113.16,73.15
  Top 0.305: U6.6 116.16,73.11 116.08,73.03 115.32,73.03 115.19,73.15 113.16,73.15 | 113.16,73.15 113.16,72.26 113.03,72.14 TP6.P$1 | 111.76,77.98 SJ16.1 112.9,77.98 113.16,77.72 113.16,74.68 | C48.A 113.16,74.68 | 113.16,73.15 113.16,74.68
3.3V6
  Top 0.203: 187.37,73.11 187.32,73.15
  Top 0.305: U7.6 190.33,73.11 190.25,73.03 189.48,73.03 189.36,73.15 187.32,73.15 | 187.32,73.15 187.32,72.26 187.2,72.14 TP7.P$1 | 185.93,77.98 SJ19.1 187.07,77.98 187.32,77.72 187.32,74.68 | C56.A 187.32,74.68 | 187.32,73.15 187.32,74.68
3.3V7
  Top 0.203: 261.53,73.11 261.49,73.15
  Top 0.305: U8.6 264.5,73.11 264.41,73.03 263.65,73.03 263.52,73.15 261.49,73.15 | 261.49,73.15 261.49,72.26 261.37,72.14 TP8.P$1 | 260.1,77.98 SJ22.1 261.24,77.98 261.49,77.72 261.49,74.68 | C64.A 261.49,74.68 | 261.49,73.15 261.49,74.68
3.3V8
  Top 0.203: 39.03,123.15 38.99,123.19
  Top 0.305: U9.6 42,123.15 41.91,123.06 41.15,123.06 41.02,123.19 38.99,123.19 | 38.99,123.19 38.99,122.3 38.86,122.17 TP9.P$1 | 37.59,128.02 SJ25.1 38.73,128.02 38.99,127.76 38.99,124.71 | C72.A 38.99,124.71 | 38.99,123.19 38.99,124.71
3.3V9
  Top 0.203: 113.2,123.15 113.16,123.19
  Top 0.305: U10.6 116.16,123.15 116.08,123.06 115.32,123.06 115.19,123.19 113.16,123.19 | 113.16,123.19 113.16,122.3 113.03,122.17 TP10.P$1 | 111.76,128.02 SJ28.1 112.9,128.02 113.16,127.76 113.16,124.71 | C80.A 113.16,124.71 | 113.16,123.19 113.16,124.71
3.3V10
  Top 0.203: 187.37,123.15 187.32,123.19
  Top 0.305: U11.6 190.33,123.15 190.25,123.06 189.48,123.06 189.36,123.19 187.32,123.19 | 187.32,123.19 187.32,122.3 187.2,122.17 TP11.P$1 | 185.93,128.02 SJ31.1 187.07,128.02 187.32,127.76 187.32,124.71 | C88.A 187.32,124.71 | 187.32,123.19 187.32,124.71
3.3V11
  Top 0.203: 261.53,123.15 261.49,123.19
  Top 0.305: U12.6 264.5,123.15 264.41,123.06 263.65,123.06 263.52,123.19 261.49,123.19 | 261.49,123.19 261.49,122.3 261.37,122.17 TP12.P$1 | 260.1,128.02 SJ34.1 261.24,128.02 261.49,127.76 261.49,124.71 | C96.A 261.49,124.71 | 261.49,123.19 261.49,124.71
5V  (via drill 0.38)
  Top 0.305: SJ1.3 35.26,29.26 v34.8,29.72
  Route2 0.305: v34.8,29.72 34.8,42.8 | 34.8,42.8 34.8,42.93 | 34.8,42.93 JP1.1 | JP2.10 14.48,43.43 14.99,42.93 27.18,42.93 | 27.18,42.93 34.8,42.93 | JP2.1 26.8,47.5 27.18,47.12 27.18,42.93 | JP1.10 46.61,47.5 47.12,46.99 47.12,43.43 46.61,42.93 34.92,42.93 34.8,42.8
5V1  (via drill 0.38)
  Top 0.305: SJ4.3 109.42,29.26 v108.97,29.72
  Route2 0.305: v108.97,29.72 108.97,42.8 | 108.97,42.8 108.97,42.93 | 108.97,42.93 JP15.1 | JP10.10 88.65,43.43 89.15,42.93 101.35,42.93 | 101.35,42.93 108.97,42.93 | JP10.1 100.97,47.5 101.35,47.12 101.35,42.93 | JP15.10 120.78,47.5 121.28,46.99 121.28,43.43 120.78,42.93 109.09,42.93 108.97,42.8
5V2  (via drill 0.38)
  Top 0.305: SJ7.3 183.59,29.26 v183.13,29.72
  Route2 0.305: v183.13,29.72 183.13,42.8 | 183.13,42.8 183.13,42.93 | 183.13,42.93 JP24.1 | JP19.10 162.81,43.43 163.32,42.93 175.51,42.93 | 175.51,42.93 183.13,42.93 | JP19.1 175.13,47.5 175.51,47.12 175.51,42.93 | JP24.10 194.94,47.5 195.45,46.99 195.45,43.43 194.94,42.93 183.26,42.93 183.13,42.8
5V3  (via drill 0.38)
  Top 0.305: SJ10.3 257.76,29.26 v257.3,29.72
  Route2 0.305: v257.3,29.72 257.3,42.8 | 257.3,42.8 257.3,42.93 | 257.3,42.93 JP33.1 | JP28.10 236.98,43.43 237.49,42.93 249.68,42.93 | 249.68,42.93 257.3,42.93 | JP28.1 249.3,47.5 249.68,47.12 249.68,42.93 | JP33.10 269.11,47.5 269.62,46.99 269.62,43.43 269.11,42.93 257.43,42.93 257.3,42.8
5V4  (via drill 0.38)
  Top 0.305: SJ13.3 35.26,79.3 v34.8,79.76
  Route2 0.305: v34.8,79.76 34.8,92.84 | 34.8,92.84 34.8,92.96 | 34.8,92.96 JP42.1 | JP37.10 14.48,93.47 14.99,92.96 27.18,92.96 | 27.18,92.96 34.8,92.96 | JP37.1 26.8,97.54 27.18,97.16 27.18,92.96 | JP42.10 46.61,97.54 47.12,97.03 47.12,93.47 46.61,92.96 34.92,92.96 34.8,92.84
5V5  (via drill 0.38)
  Top 0.305: SJ16.3 109.42,79.3 v108.97,79.76
  Route2 0.305: v108.97,79.76 108.97,92.84 | 108.97,92.84 108.97,92.96 | 108.97,92.96 JP51.1 | JP46.10 88.65,93.47 89.15,92.96 101.35,92.96 | 101.35,92.96 108.97,92.96 | JP46.1 100.97,97.54 101.35,97.16 101.35,92.96 | JP51.10 120.78,97.54 121.28,97.03 121.28,93.47 120.78,92.96 109.09,92.96 108.97,92.84
5V6  (via drill 0.38)
  Top 0.305: SJ19.3 183.59,79.3 v183.13,79.76
  Route2 0.305: v183.13,79.76 183.13,92.84 | 183.13,92.84 183.13,92.96 | 183.13,92.96 JP60.1 | JP55.10 162.81,93.47 163.32,92.96 175.51,92.96 | 175.51,92.96 183.13,92.96 | JP55.1 175.13,97.54 175.51,97.16 175.51,92.96 | JP60.10 194.94,97.54 195.45,97.03 195.45,93.47 194.94,92.96 183.26,92.96 183.13,92.84
5V7  (via drill 0.38)
  Top 0.305: SJ22.3 257.76,79.3 v257.3,79.76
  Route2 0.305: v257.3,79.76 257.3,92.84 | 257.3,92.84 257.3,92.96 | 257.3,92.96 JP69.1 | JP64.10 236.98,93.47 237.49,92.96 249.68,92.96 | 249.68,92.96 257.3,92.96 | JP64.1 249.3,97.54 249.68,97.16 249.68,92.96 | JP69.10 269.11,97.54 269.62,97.03 269.62,93.47 269.11,92.96 257.43,92.96 257.3,92.84
5V8  (via drill 0.38)
  Top 0.305: SJ25.3 35.26,129.34 v34.8,129.79
  Route2 0.305: v34.8,129.79 34.8,142.88 | 34.8,142.88 34.8,143 | 34.8,143 JP78.1 | JP73.10 14.48,143.51 14.99,143 27.18,143 | 27.18,143 34.8,143 | JP73.1 26.8,147.57 27.18,147.19 27.18,143 | JP78.10 46.61,147.57 47.12,147.07 47.12,143.51 46.61,143 34.92,143 34.8,142.88
5V9  (via drill 0.38)
  Top 0.305: SJ28.3 109.42,129.34 v108.97,129.79
  Route2 0.305: v108.97,129.79 108.97,142.88 | 108.97,142.88 108.97,143 | 108.97,143 JP87.1 | JP82.10 88.65,143.51 89.15,143 101.35,143 | 101.35,143 108.97,143 | JP82.1 100.97,147.57 101.35,147.19 101.35,143 | JP87.10 120.78,147.57 121.28,147.07 121.28,143.51 120.78,143 109.09,143 108.97,142.88
5V10  (via drill 0.38)
  Top 0.305: SJ31.3 183.59,129.34 v183.13,129.79
  Route2 0.305: v183.13,129.79 183.13,142.88 | 183.13,142.88 183.13,143 | 183.13,143 JP96.1 | JP91.10 162.81,143.51 163.32,143 175.51,143 | 175.51,143 183.13,143 | JP91.1 175.13,147.57 175.51,147.19 175.51,143 | JP96.10 194.94,147.57 195.45,147.07 195.45,143.51 194.94,143 183.26,143 183.13,142.88
5V11  (via drill 0.38)
  Top 0.305: SJ34.3 257.76,129.34 v257.3,129.79
  Route2 0.305: v257.3,129.79 257.3,142.88 | 257.3,142.88 257.3,143 | 257.3,143 JP105.1 | JP100.10 236.98,143.51 237.49,143 249.68,143 | 249.68,143 257.3,143 | JP100.1 249.3,147.57 249.68,147.19 249.68,143 | JP105.10 269.11,147.57 269.62,147.07 269.62,143.51 269.11,143 257.43,143 257.3,142.88
ADC  (via drill 0.38)
  Top 0.203: U1.5 v41.53,23.72 | v51.31,26.8 52.45,25.65 61.98,25.65 62.74,24.89 v62.74,23.24
  Top 0.305: R4.P$2 R4.P$3 R5.2
  Bottom 0.203: v41.53,23.72 41.05,23.72 40.89,23.88 40.89,28.83 41.53,29.46 50.55,29.46 50.93,29.08 50.93,27.18 v51.31,26.8 | v62.74,23.24 R4.P$3
ADC1  (via drill 0.38)
  Top 0.203: U2.5 v115.7,23.72 | v125.48,26.8 126.62,25.65 136.14,25.65 136.91,24.89 v136.91,23.24
  Top 0.305: R10.P$2 R10.P$3 R11.2
  Bottom 0.203: v115.7,23.72 115.22,23.72 115.06,23.88 115.06,28.83 115.7,29.46 124.71,29.46 125.09,29.08 125.09,27.18 v125.48,26.8 | v136.91,23.24 R10.P$3
ADC2  (via drill 0.38)
  Top 0.203: U3.5 v189.87,23.72 | v199.64,26.8 200.79,25.65 210.31,25.65 211.07,24.89 v211.07,23.24
  Top 0.305: R16.P$2 R16.P$3 R17.2
  Bottom 0.203: v189.87,23.72 189.38,23.72 189.23,23.88 189.23,28.83 189.87,29.46 198.88,29.46 199.26,29.08 199.26,27.18 v199.64,26.8 | v211.07,23.24 R16.P$3
ADC3  (via drill 0.38)
  Top 0.203: U4.5 v264.03,23.72 | v273.81,26.8 274.95,25.65 284.48,25.65 285.24,24.89 v285.24,23.24
  Top 0.305: R22.P$2 R22.P$3 R23.2
  Bottom 0.203: v264.03,23.72 263.55,23.72 263.4,23.88 263.4,28.83 264.03,29.46 273.05,29.46 273.43,29.08 273.43,27.18 v273.81,26.8 | v285.24,23.24 R22.P$3
ADC4  (via drill 0.38)
  Top 0.203: U5.5 v41.53,73.76 | v51.31,76.83 52.45,75.69 61.98,75.69 62.74,74.93 v62.74,73.28
  Top 0.305: R28.P$2 R28.P$3 R29.2
  Bottom 0.203: v41.53,73.76 41.05,73.76 40.89,73.91 40.89,78.87 41.53,79.5 50.55,79.5 50.93,79.12 50.93,77.22 v51.31,76.83 | v62.74,73.28 R28.P$3
ADC5  (via drill 0.38)
  Top 0.203: U6.5 v115.7,73.76 | v125.48,76.83 126.62,75.69 136.14,75.69 136.91,74.93 v136.91,73.28
  Top 0.305: R34.P$2 R34.P$3 R35.2
  Bottom 0.203: v115.7,73.76 115.22,73.76 115.06,73.91 115.06,78.87 115.7,79.5 124.71,79.5 125.09,79.12 125.09,77.22 v125.48,76.83 | v136.91,73.28 R34.P$3
ADC6  (via drill 0.38)
  Top 0.203: U7.5 v189.87,73.76 | v199.64,76.83 200.79,75.69 210.31,75.69 211.07,74.93 v211.07,73.28
  Top 0.305: R40.P$2 R40.P$3 R41.2
  Bottom 0.203: v189.87,73.76 189.38,73.76 189.23,73.91 189.23,78.87 189.87,79.5 198.88,79.5 199.26,79.12 199.26,77.22 v199.64,76.83 | v211.07,73.28 R40.P$3
ADC7  (via drill 0.38)
  Top 0.203: U8.5 v264.03,73.76 | v273.81,76.83 274.95,75.69 284.48,75.69 285.24,74.93 v285.24,73.28
  Top 0.305: R46.P$2 R46.P$3 R47.2
  Bottom 0.203: v264.03,73.76 263.55,73.76 263.4,73.91 263.4,78.87 264.03,79.5 273.05,79.5 273.43,79.12 273.43,77.22 v273.81,76.83 | v285.24,73.28 R46.P$3
ADC8  (via drill 0.38)
  Top 0.203: U9.5 v41.53,123.8 | v51.31,126.87 52.45,125.73 61.98,125.73 62.74,124.97 v62.74,123.32
  Top 0.305: R52.P$2 R52.P$3 R53.2